# Altium PCB pcb.pcbdoc (part 1 of 6)
Units mm, origin at the board's own origin, x right, y up, seen from the top; angles counter-clockwise.
Board outline 95 x 60 mm, 4 copper layers (Top Layer, TopInt Layer, BotInt Layer, Bottom Layer), stack 1.459 mm thick; 162 components, 164 nets, 673 pads, 269 vias.
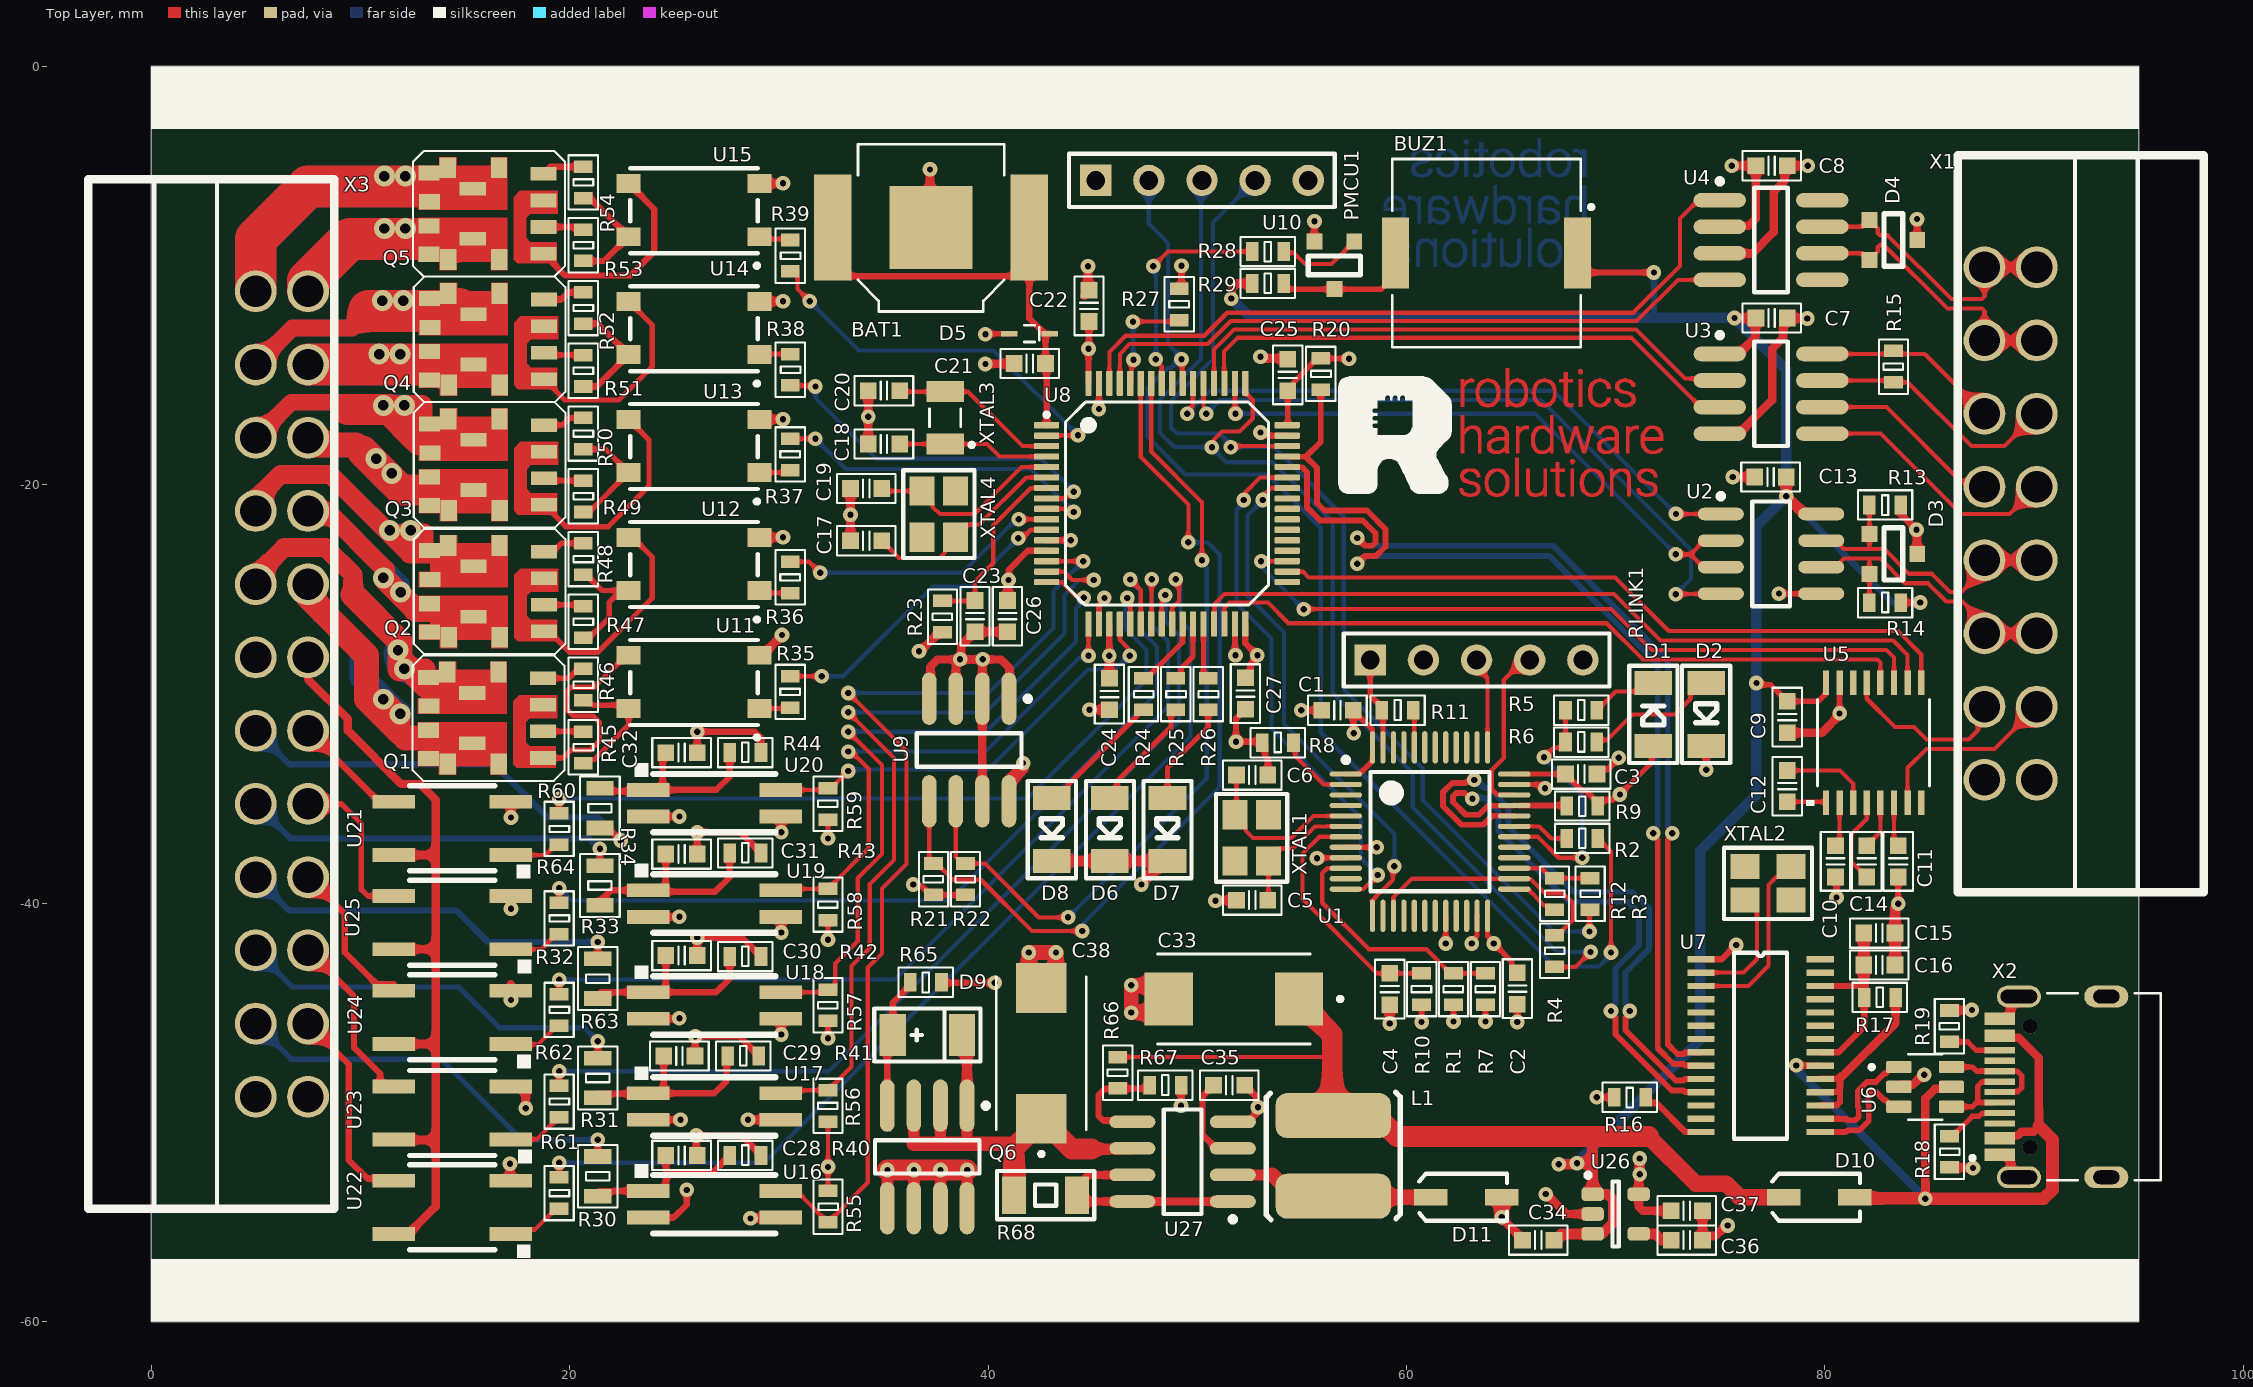
[diagram p0: Top Layer view]
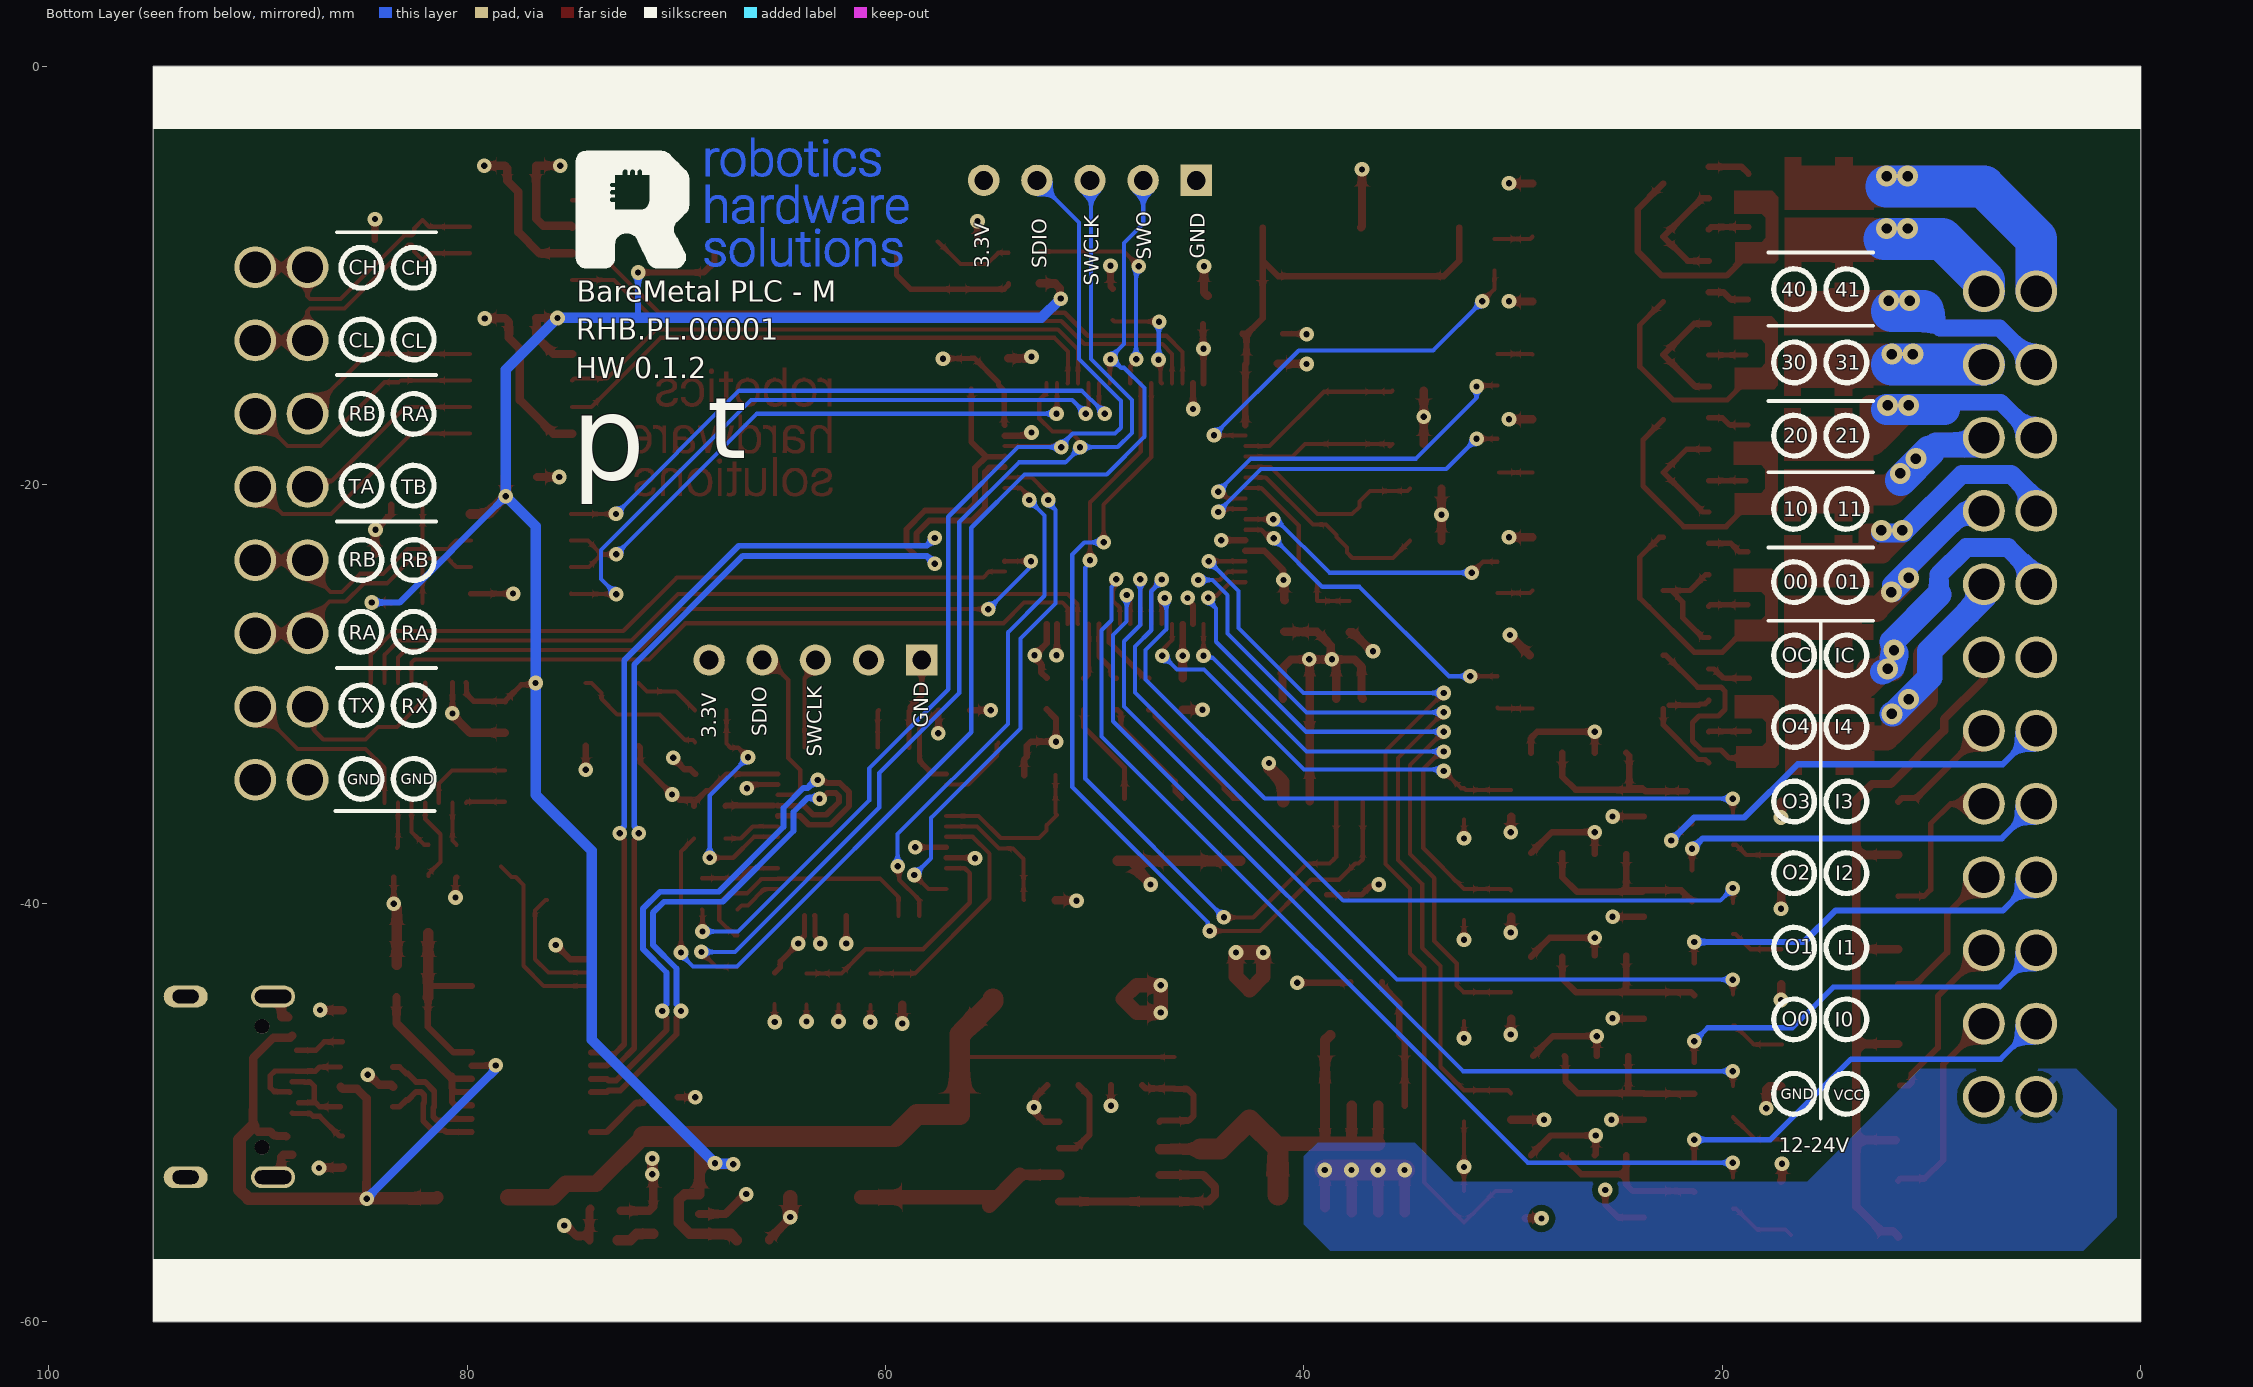
[diagram p1: Bottom Layer view, seen from below]
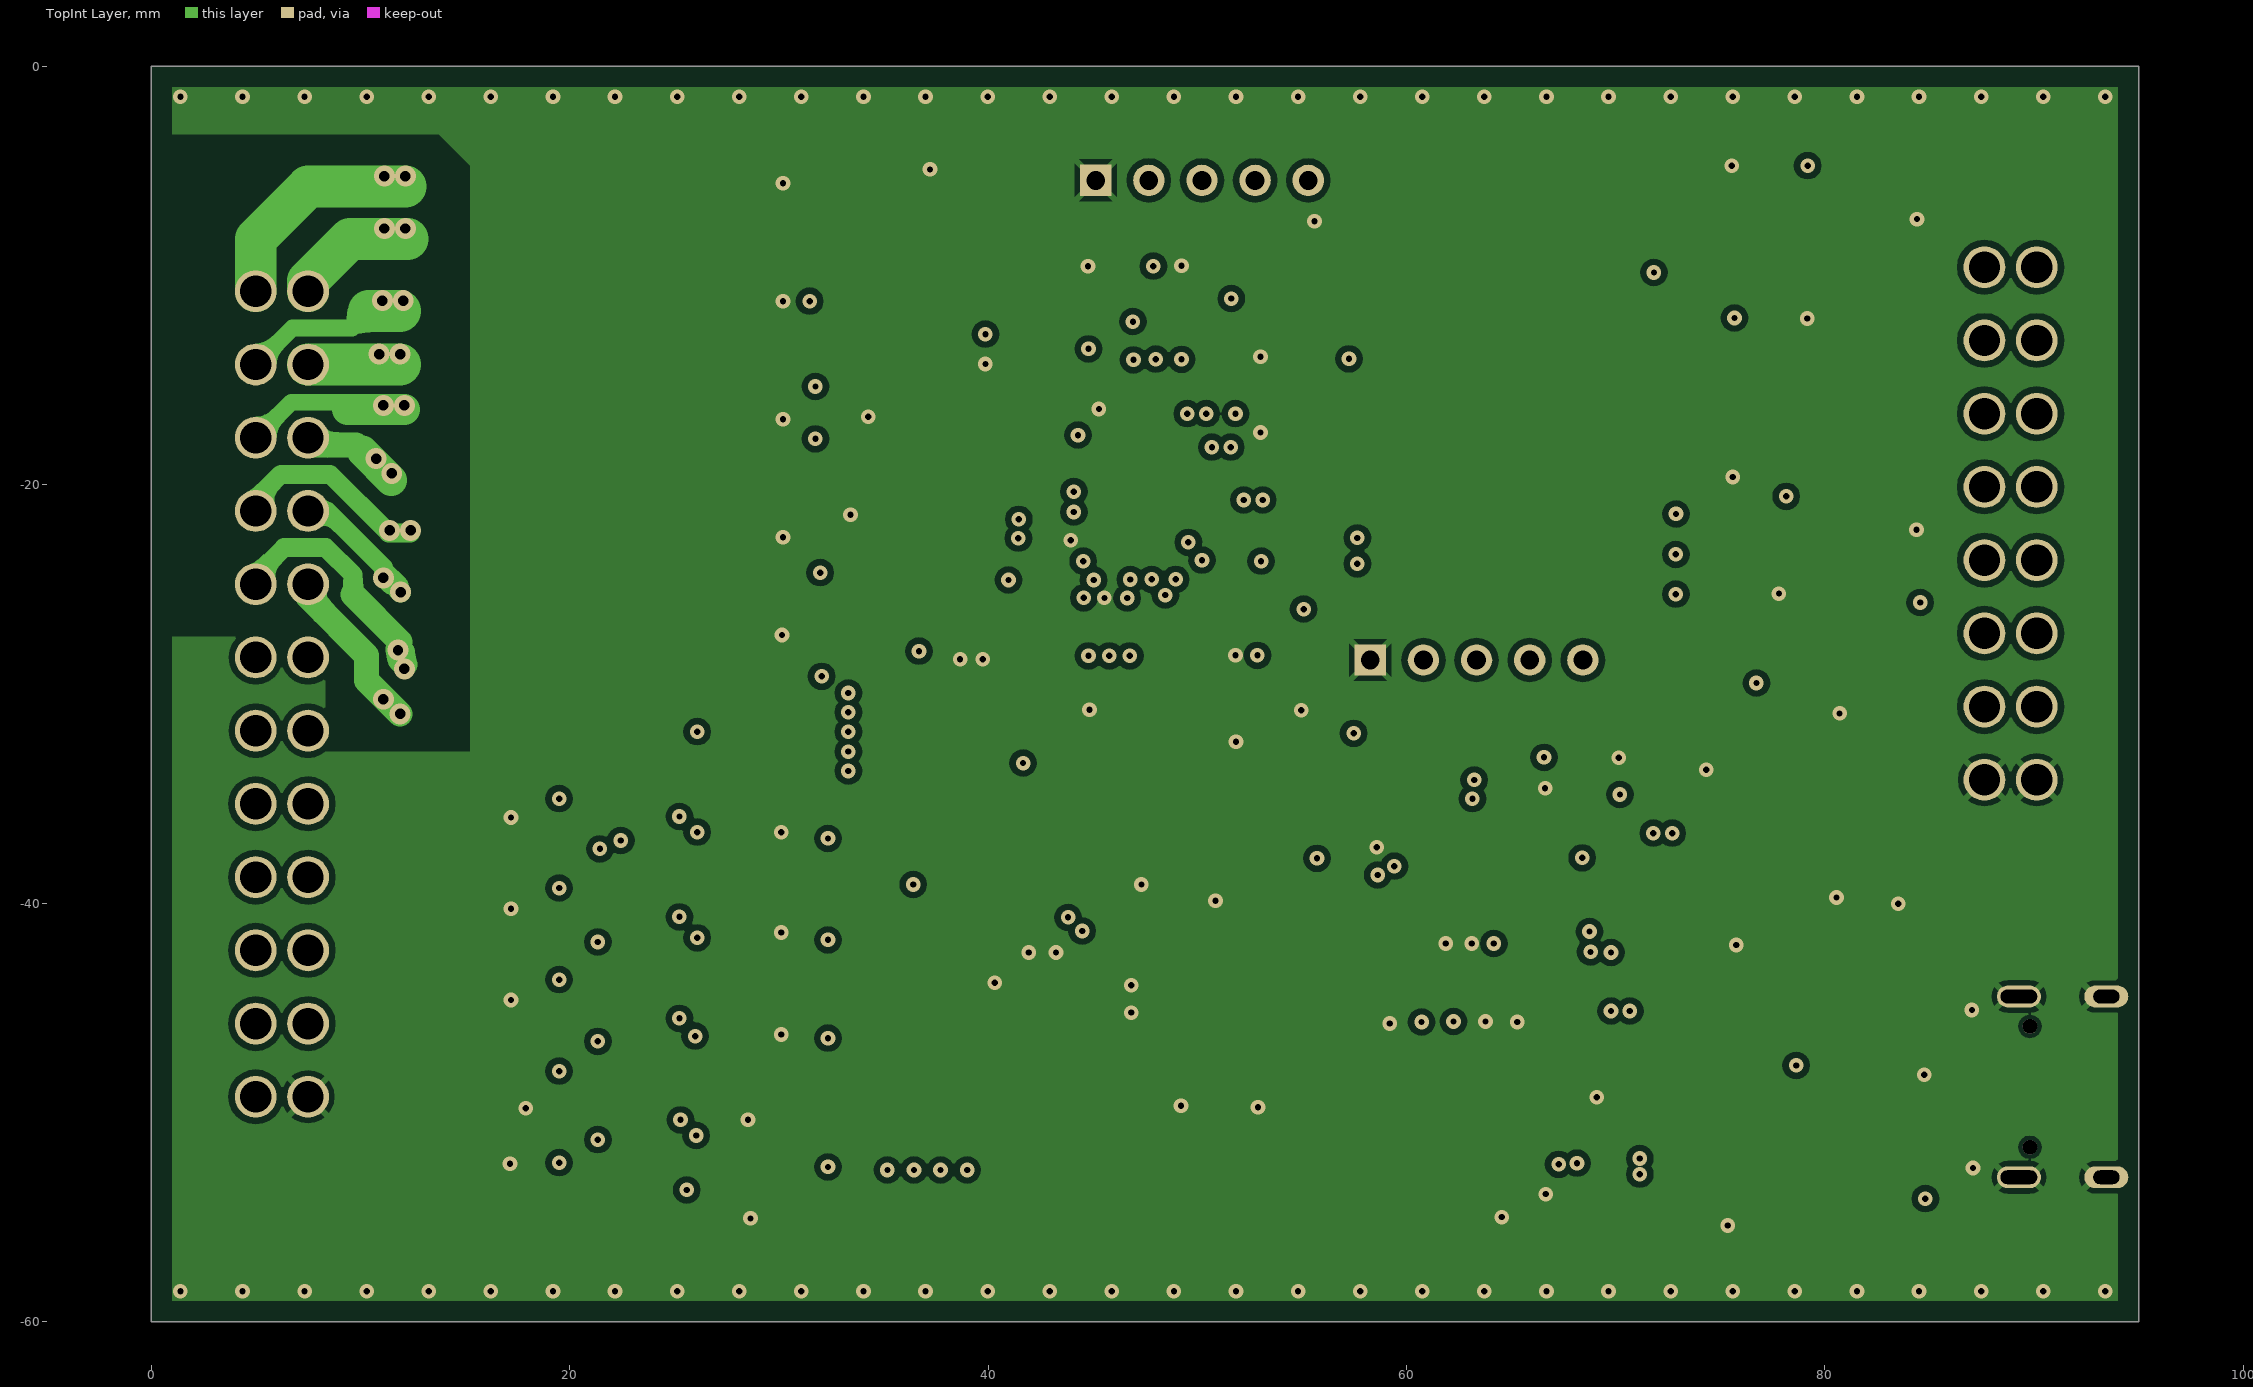
[diagram p2: TopInt Layer]
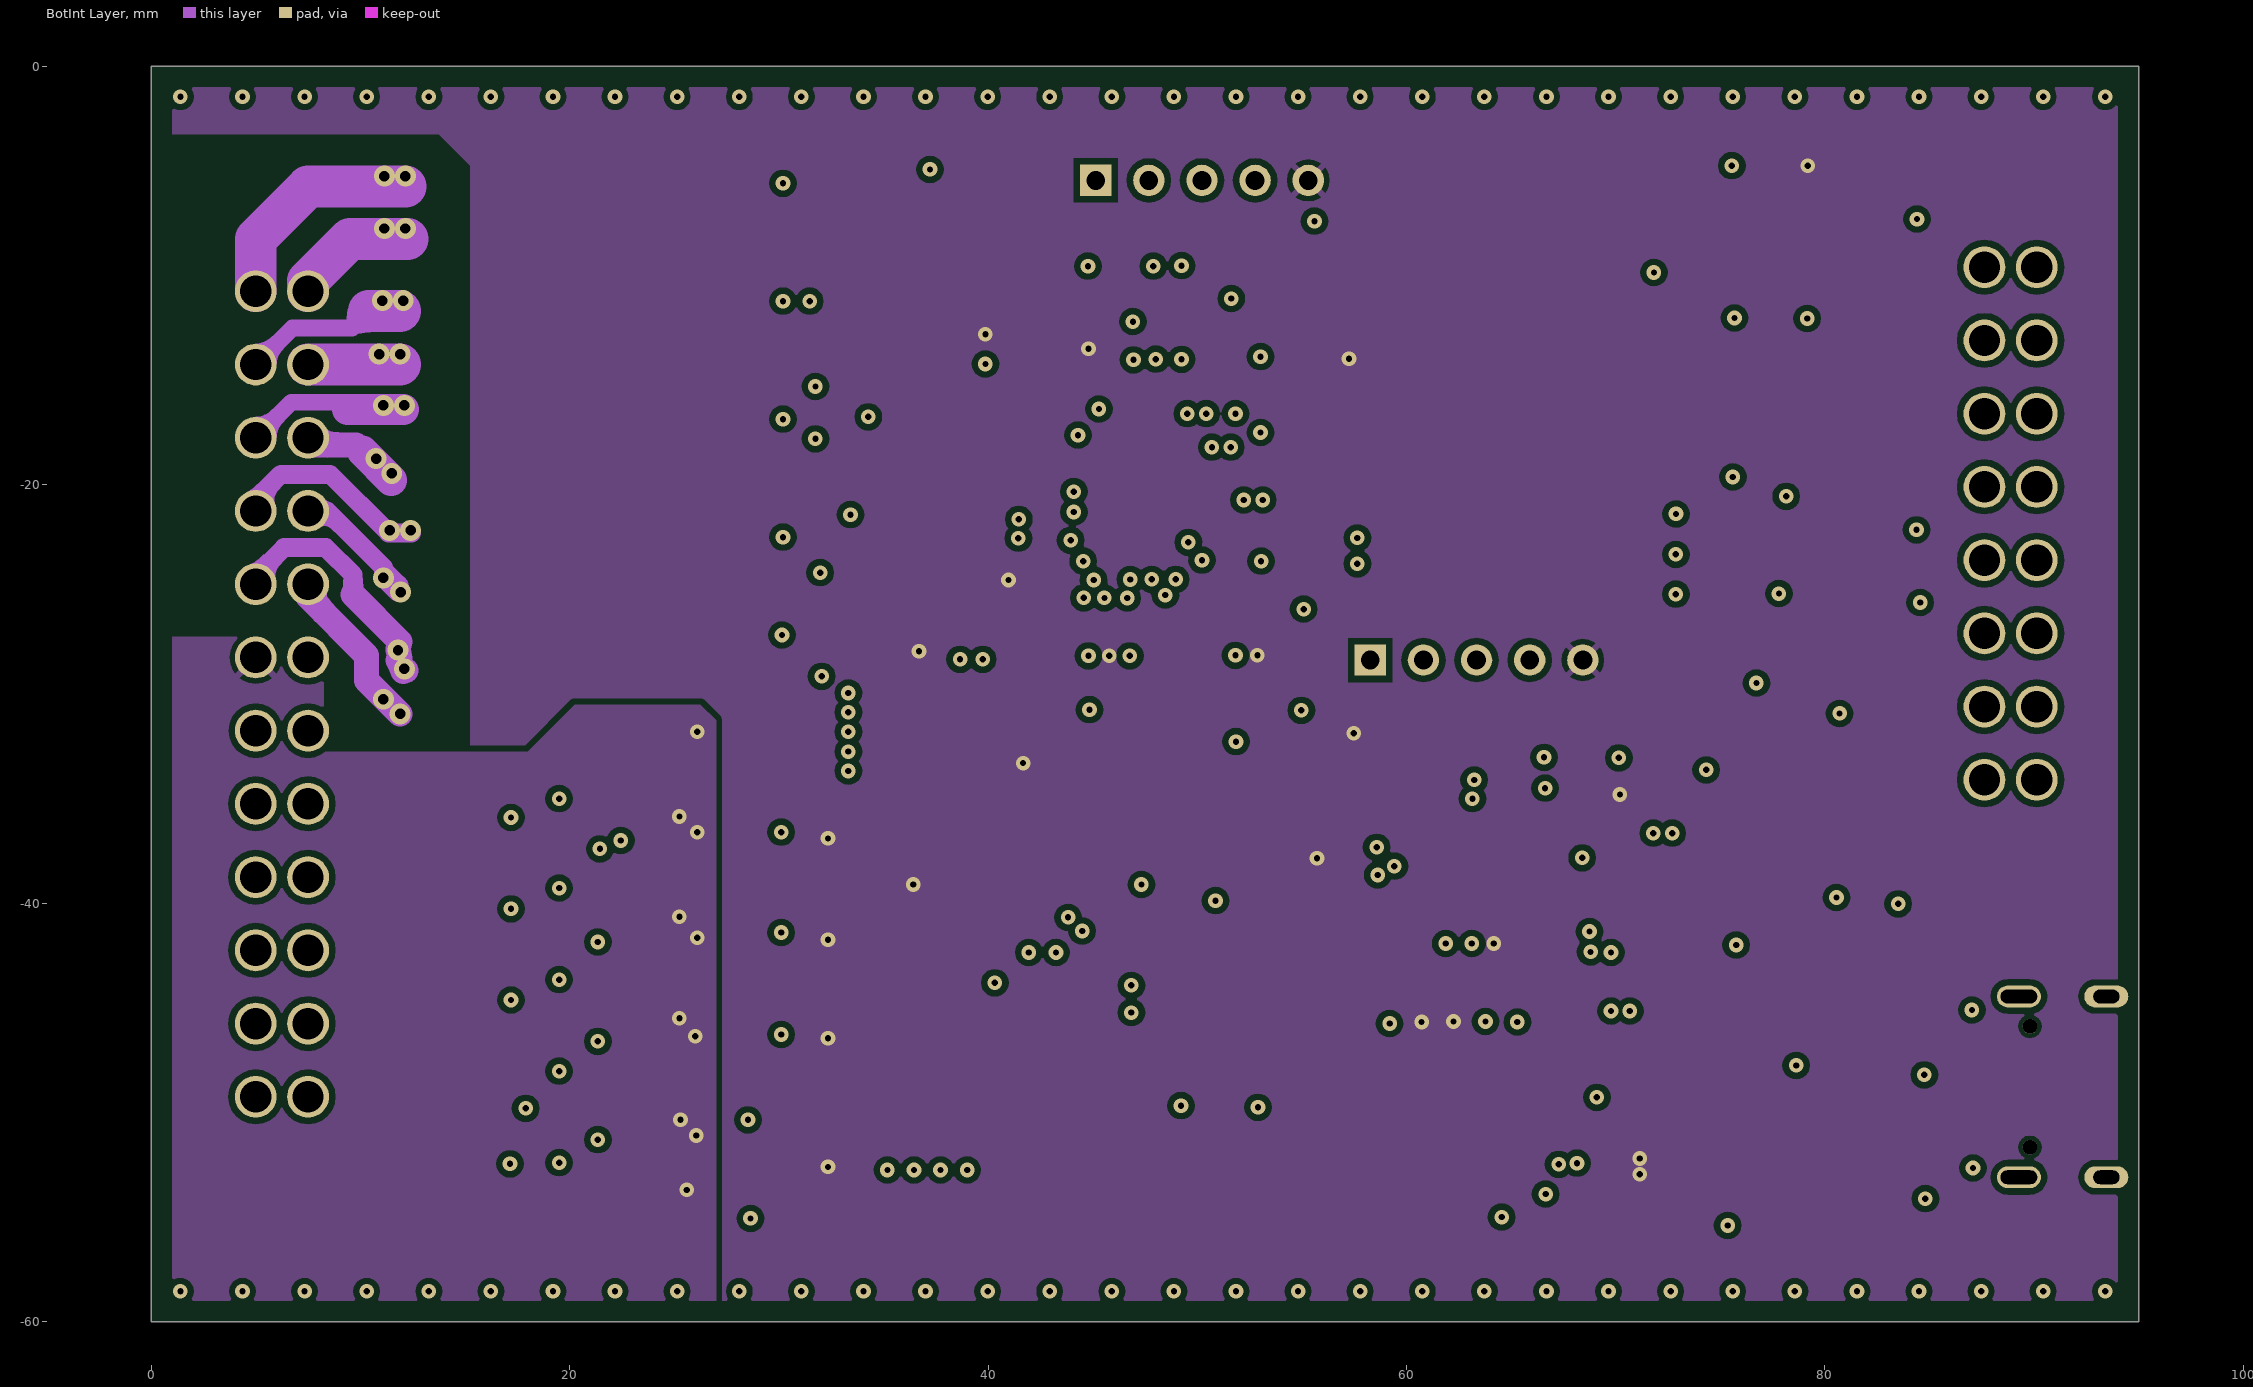
[diagram p3: BotInt Layer]

## Layer stack, top to bottom
Top Solder: solder mask 0.0102, Solder Resist, Dk 3.5
Top Layer: signal copper 0.0356
Dielectric 1: prepreg 0.193, FR-4 (TG-150), Dk 4.6
TopInt Layer: signal copper 0.036
Dielectric 3: core 0.93, FR-4 (TG-150), Dk 4.6
BotInt Layer: signal copper 0.036
Dielectric 2: prepreg 0.193, FR-4 (TG-150), Dk 4.6
Bottom Layer: signal copper 0.0356
Bottom Solder: solder mask 0.0102, Solder Resist, Dk 3.5

## Board outline
0,-60 95,-60 95,0 0,0

## Design rules (kind name [scope] priority, off if disabled: settings)
Clearance [All] p1: gap=0.2 ignorepadtopadclearanceinfootprint=FALSE except(0.3: Arc-Poly Track-Poly SMDPad-Poly THPad-Poly Via-Poly Fill-Poly Poly-Poly)
DiffPairsRouting [InDifferentialPair('USB')] p1: maxlimit=0.2 minlimit=0.127 mostfreqgap=0.2 toplayer_mingap=0.2 toplayer_minwidth=0.279 toplayer_maxwidth=0.279 toplayer_prefwidth=0.279 midlayer1_maxgap=0.127 midlayer1_prefgap=0.127 midlayer1_minwidth=0.096 midlayer1_maxwidth=0.096 midlayer1_prefwidth=0.096 midlayer2_maxgap=0.127 midlayer2_prefgap=0.127 midlayer2_minwidth=0.096 midlayer2_maxwidth=0.096 midlayer2_prefwidth=0.096 bottomlayer_mingap=0.2 bottomlayer_minwidth=0.279 bottomlayer_maxwidth=0.279 bottomlayer_prefwidth=0.279 maxuncoupledlength=12.7
DiffPairsRouting DiffPairsRouting2 [InDifferentialPair('MCU_USB')] p2: maxlimit=0.2 minlimit=0.127 mostfreqgap=0.2 toplayer_mingap=0.2 toplayer_minwidth=0.279 toplayer_maxwidth=0.279 toplayer_prefwidth=0.279 midlayer1_maxgap=0.127 midlayer1_prefgap=0.127 midlayer1_minwidth=0.096 midlayer1_maxwidth=0.096 midlayer1_prefwidth=0.096 midlayer2_maxgap=0.127 midlayer2_prefgap=0.127 midlayer2_minwidth=0.096 midlayer2_maxwidth=0.096 midlayer2_prefwidth=0.096 bottomlayer_mingap=0.2 bottomlayer_minwidth=0.279 bottomlayer_maxwidth=0.279 bottomlayer_prefwidth=0.279 impedanceprofiledriven=TRUE impedanceprofileid={8D9E8F22-5787-4A63-B55F-5B9D1A999BD1} impedanceprofilevalue=90.000000 maxuncoupledlength=12.7
DiffPairsRouting DiffPairsRouting1 [InDifferentialPair('RLINK_USB')] p3: maxlimit=0.2 minlimit=0.127 mostfreqgap=0.2 toplayer_mingap=0.2 toplayer_minwidth=0.279 toplayer_maxwidth=0.279 toplayer_prefwidth=0.279 midlayer1_maxgap=0.127 midlayer1_prefgap=0.127 midlayer1_minwidth=0.096 midlayer1_maxwidth=0.096 midlayer1_prefwidth=0.096 midlayer2_maxgap=0.127 midlayer2_prefgap=0.127 midlayer2_minwidth=0.096 midlayer2_maxwidth=0.096 midlayer2_prefwidth=0.096 bottomlayer_mingap=0.2 bottomlayer_minwidth=0.279 bottomlayer_maxwidth=0.279 bottomlayer_prefwidth=0.279 impedanceprofiledriven=TRUE impedanceprofileid={8D9E8F22-5787-4A63-B55F-5B9D1A999BD1} impedanceprofilevalue=90.000000 maxuncoupledlength=12.7
HoleSize [All] p1: absolutevalues=TRUE maxlimit=4 minlimit=0.2 maxpercent=80.000 minpercent=20.000
MatchedLengths [InNetClass('Undefined')] p1: tolerance=0.5 checknetsindiffpair=FALSE checkdiffpairvsdiffpair=TRUE checkxsignals=TRUE checkothers=TRUE
MinimumSolderMaskSliver [All] p1: minsoldermaskwidth=0.02
PolygonConnect [All] p1: thpad.connectstyle=Relief thpad.reliefconductorwidth=0.3 thpad.reliefentries=4 thpad.polygonreliefangle="45 Angle" thpad.airgapwidth=0.25 smdpad.connectstyle=Relief smdpad.reliefconductorwidth=0.254 smdpad.reliefentries=4 smdpad.polygonreliefangle="90 Angle" smdpad.airgapwidth=0.254 via.connectstyle=Direct via.reliefconductorwidth=0.3 via.reliefentries=4 via.polygonreliefangle="90 Angle" via.airgapwidth=0.25
RoutingVias [All] p1: holewidth=0.3 width=0.7 viastyle="Through Hole" minholewidth=0.3 minwidth=0.7 maxholewidth=0.3 maxwidth=0.7
SilkToSilkClearance [All] p1: silktosilkclearance=0
SilkToSolderMaskClearance [IsPad] p1: minsilkscreentomaskgap=0.01 clearancetoexposedcopper=TRUE
SolderMaskExpansion [All] p1: expansion=0.05 istentingtop=FALSE
Width [All] p1: maxlimit=25 minlimit=0.2 preferedwidth=1 midlayer1_maxwidth=5 midlayer2_maxwidth=5 minimp=50.000000 maximp=50.000000 favimp=50.000000
25 further rules are at their usual default settings.

## Classes and differential pairs
component class usb: C15 C16 R16 R17 R18 R19 U6 U7 X2 XTAL2
component class dcdc: C33 C34 C35 C36 C37 C38 D10 D11 L1 R66 R67 R68 U26 U27
component class MCU: BAT1 BUZ1 C17 C18 C19 C20 C21 C22 C23 C24 C25 C26 C27 D5 D6 D7 D8 R20 R21 R22 R23 R24 R25 R26 R27 R28 R29 U8 U9 U10 XTAL3 XTAL4
component class interfaces: C7 C8 C9 C10 C11 C12 C13 C14 D3 D4 R13 R14 R15 U2 U3 U4 U5 X1
component class connections: C28 C29 C30 C31 C32 D9 Q1 Q2 Q3 Q4 Q5 Q6 R30 R31 R32 R33 R34 R35 R36 R37 R38 R39 R40 R41 R42 R43 R44 R45 R46 R47 R48 R49 R50 R51 R52 R53 R54 R55 R56 R57 R58 R59 R60 R61 R62 R63 R64 R65 U11 U12 U13 U14 U15 U16 U17 U18 U19 U20 U21 U22 U23 U24 U25 X3
component class rlink: C1 C2 C3 C4 C5 C6 D1 D2 PMCU1 R1 R2 R3 R4 R5 R6 R7 R8 R9 R10 R11 R12 RLINK1 U1 XTAL1
differential pair RLINK_USB: +RLINK_USB_P -RLINK_USB_N
differential pair MCU_USB: +MCU_USB_P -MCU_USB_N
differential pair USB: +USB_P -USB_N
differential pair USB_CONN_D: +USB_CONN_D_P -USB_CONN_D_N
differential pair RS485: +RS485_P -RS485_N
differential pair RS422_TX: +RS422_TX_P -RS422_TX_N
differential pair RS422_RX: +RS422_RX_P -RS422_RX_N
differential pair CAN: +CAN_P -CAN_N

## Components (designator, comment, footprint, x,y, rotation, side; value= is the part's Value field where it differs from the comment)
BAT1 "2998TR" BAT_2998TR 37.275,-7.7 r180 top
BUZ1 "L-KLS3-SMT-09X1.8" SPKR_PKMCS0909E4000-R1 63.825,-8.925 r180 top locked
C1 "100nF" C_0603 56.7,-30.775 r0 top
C2 "100nF" C_0603 65.3,-44.075 r90 top
C3 "100nF" C_0603 68.35,-33.825 r180 top
C4 "100nF" C_0603 59.2,-44.1 r90 top
C5 "8pF 50V" C_0603 52.625,-39.85 r0 top
C6 "8pF 50V" C_0603 52.625,-33.875 r180 top
C7 "100nF" C_0603 77.45,-12.025 r180 top
C8 "100nF" C_0603 77.45,-4.75 r0 top
C9 "100nF" C_0603 78.2,-31.1 r90 top
C10 "100nF" C_0603 80.5,-38 r90 top
C11 "100nF" C_0603 83.5,-38 r90 top
C12 "100nF" C_0603 78.2,-34.4 r90 top
C13 "100nF" C_0603 77.4,-19.625 r0 top
C14 "100nF" C_0603 82,-38 r90 top
C15 "100nF" C_0603 82.6,-41.425 r180 top
C16 "1uF 16V" C_0603 82.6,-42.95 r180 top
C17 "8pF 50V" C_0603 34.175,-22.675 r0 top
C18 "8pF 50V" C_0603 35.025,-18.05 r0 top
C19 "8pF 50V" C_0603 34.175,-20.175 r0 top
C20 "8pF 50V" C_0603 35.025,-15.5 r0 top
C21 "100nF" C_0603 42,-14.2 r0 top
C22 "100nF" C_0603 44.825,-11.45 r270 top
C23 "100nF" C_0603 39.375,-26.275 r90 top
C24 "100nF" C_0603 45.8,-30 r90 top
C25 "100nF" C_0603 54.325,-14.75 r270 top
C26 "100nF" C_0603 40.925,-26.275 r90 top
C27 "100nF" C_0603 52.3,-29.975 r90 top
C28 "100nF" C_0603 25.35,-52.05 r180 top
C29 "100nF" C_0603 25.25,-47.3 r180 top
C30 "100nF" C_0603 25.35,-42.5 r180 top
C31 "100nF" C_0603 25.35,-37.65 r180 top
C32 "100nF" C_0603 25.35,-32.8 r180 top
C33 "150uF 16V" TANTAL_TYPE_D 51.75,-44.575 r180 top
C34 "1uF 16V" C_0603 66.3,-56.1 r0 top
C35 "470pF 16V" C_0603 51.525,-48.7 r180 top
C36 "10nF 16V" C_0603 73.4,-56.1 r180 top
C37 "1uF 16V" C_0603 73.4,-54.7 r180 top
C38 "47uF 35V" TANTAL_TYPE_X 42.55,-47.175 r90 top
D1 "Green" LED_1206 71.8,-30.975 r90 top
D2 "Green" LED_1206 74.325,-30.975 r270 top
D3 "SM712-02HTG" SOT23 82.125,-22.353 r0 top
D4 "ESDCAN24-2BLY" SOT23 82.125,-7.35 r0 top
D5 "RB521S30T1G" SOD-523 41.975,-12.775 r180 top
D6 "Yellow" LED_1206 45.825,-36.475 r270 top
D7 "Green" LED_1206 48.575,-36.475 r270 top
D8 "Red" LED_1206 43.05,-36.475 r270 top
D9 "BZV55C10" SOD80C 37.1,-46.3 r0 top
D10 "SM5819PL-TP" SOD-123 79.725,-54.05 r180 top
D11 "SM5819PL-TP" SOD-123 62.85,-54.05 r180 top
L1 "CD54NP-221KC" CD54NP 56.5,-52.075 r180 top
PMCU1 "PLS2-5" PLS-5-3D 45.145,-5.45 r0 top
Q1 "IPG20N06S2L65AATMA1" "POWERFLAT 5X6" 12.75,-31.15 r90 top
Q2 "IPG20N06S2L65AATMA1" "POWERFLAT 5X6" 12.8,-25.1 r90 top
Q3 "IPG20N06S2L65AATMA1" "POWERFLAT 5X6" 12.8,-19.05 r90 top
Q4 "IPG20N06S2L65AATMA1" "POWERFLAT 5X6" 12.8,-13.05 r90 top
Q5 "IPG20N06S2L65AATMA1" "POWERFLAT 5X6" 12.775,-7.045 r90 top
Q6 "IRF7205" SO-8_M 37.09,-52.123 r270 top
R1 "4.7K" R_0603 63.775,-44.1 r270 top value=4.7k
R2 "0" R_0603 68.4,-36.9 r180 top
R3 "0" R_0603 68.775,-39.55 r90 top
R4 "0" R_0603 67.075,-42.275 r90 top
R5 "100" R_0603 68.35,-30.775 r180 top
R6 "100" R_0603 68.35,-32.3 r180 top
R7 "4.7K" R_0603 62.25,-44.1 r270 top value=4.7k
R8 "10K" R_0603 53.85,-32.325 r180 top value=10k
R9 "1.5K" R_0603 68.4,-35.35 r0 top value=1.5k
R10 "100K" R_0603 60.725,-44.1 r270 top value=100k
R11 "100K" R_0603 59.575,-30.775 r180 top value=100k
R12 "100" R_0603 67.075,-39.55 r90 top
R13 "10k" R_0603 82.875,-20.958 r0 top
R14 "10k" R_0603 82.875,-25.633 r180 top
R15 "120" R_0603 83.275,-14.35 r270 top
R16 "2.7k" R_0603 70.675,-49.275 r0 top
R17 "100k" R_0603 82.625,-44.5 r180 top
R18 "5.1k" R_0603 85.95,-51.875 r90 top
R19 "5.1k" R_0603 85.95,-45.875 r270 top
R20 "1.5k" R_0603 55.9,-14.7 r90 top
R21 "4.7k" R_0603 37.4,-38.85 r270 top
R22 "4.7k" R_0603 38.925,-38.85 r270 top
R23 "10K" R_0603 37.825,-26.3 r270 top value=10k
R24 "100" R_0603 47.425,-30 r90 top
R25 "100" R_0603 48.975,-30 r90 top
R26 "100" R_0603 50.525,-30 r90 top
R27 "10K" R_0603 49.142,-11.375 r270 top value=10k
R28 "3.3K" R_0603 53.375,-8.85 r0 top value=3.3k
R29 "1K" R_0603 53.375,-10.375 r180 top value=1k
R30 "3.3K" R_0805 21.35,-53.05 r270 top value=3.3k
R31 "3.3K" R_0805 21.35,-48.35 r270 top value=3.3k
R32 "3.3K" R_0805 21.35,-43.6 r270 top value=3.3k
R33 "3.3K" R_0805 21.45,-39.15 r270 top value=3.3k
R34 "3.3K" R_0805 21.45,-35.45 r90 top value=3.3k
R35 "100" R_0603 30.55,-29.9 r270 top
R36 "100" R_0603 30.55,-24.425 r270 top
R37 "100" R_0603 30.55,-18.55 r270 top
R38 "100" R_0603 30.55,-14.5 r90 top
R39 "100" R_0603 30.55,-9.05 r90 top
R40 "680" R_0603 28.4,-52.05 r180 top
R41 "680" R_0603 28.3,-47.3 r180 top
R42 "680" R_0603 28.4,-42.55 r180 top
R43 "680" R_0603 28.4,-37.6 r180 top
R44 "680" R_0603 28.4,-32.8 r180 top
R45 "100" R_0603 20.65,-32.55 r90 top
R46 "100" R_0603 20.65,-29.55 r90 top
R47 "100" R_0603 20.65,-26.55 r90 top
R48 "100" R_0603 20.65,-23.55 r90 top
R49 "100" R_0603 20.65,-20.55 r90 top
R50 "100" R_0603 20.65,-17.55 r90 top
R51 "100" R_0603 20.65,-14.55 r90 top
R52 "100" R_0603 20.65,-11.55 r90 top
R53 "100" R_0603 20.65,-8.55 r90 top
R54 "100" R_0603 20.65,-5.55 r90 top
R55 "1K" R_0603 32.35,-54.5 r90 top value=1k
R56 "1K" R_0603 32.35,-49.688 r270 top value=1k
R57 "1K" R_0603 32.35,-44.875 r270 top value=1k
R58 "1K" R_0603 32.35,-40.063 r270 top value=1k
R59 "1K" R_0603 32.35,-35.25 r270 top value=1k
R60 "1K" R_0603 19.5,-36.45 r90 top value=1k
R61 "1K" R_0603 19.5,-53.85 r90 top value=1k
R62 "1K" R_0603 19.5,-49.475 r90 top value=1k
R63 "1K" R_0603 19.5,-45.1 r90 top value=1k
R64 "1K" R_0603 19.5,-40.725 r90 top value=1k
R65 "100K" R_0603 37.025,-43.775 r0 top value=100k
R66 "3.6K" R_0603 46.2,-48.1 r270 top value=3.6k
R67 "1.2K" R_0603 48.475,-48.7 r180 top value=1.2k
R68 "0.33" R_1206 42.75,-53.95 r0 top
RLINK1 "PLS2-5" PLS-5-3D 58.27,-28.375 r0 top
U1 "STM32F103CBT6" LQFP48_L 61.125,-36.575 r0 top locked
U2 "SN75176BDR" SO-8 77.425,-23.3 r0 top locked
U3 "MAX488CSA" SO-8_M 77.425,-15.65 r0 top locked
U4 "SN65HVD232D" SO-8_M 77.425,-8.3 r0 top locked
U5 "ST232CTR" TSSOP16_STM 82.325,-32.329 r90 top locked
U6 "USBLC6-2SC6" SOT95P280X145-6N 84.79,-48.775 r0 top
U7 "FE1.1S_BSOP28" BSOP28 74.075,-42.68 r0 top
U8 "STM32F103RET6" LQFP64 48.55,-20.9 r0 top locked
U9 "24c256" SO-8_M 39.095,-32.675 r270 top
U10 "BC847B" SOT23 57.503,-8.364 r270 top
U11 "VOM1271" SOP-4 25.95,-29.45 r180 top
U12 "VOM1271" SOP-4 25.95,-23.812 r180 top
U13 "VOM1271" SOP-4 25.95,-18.175 r180 top
U14 "VOM1271" SOP-4 25.95,-12.538 r180 top
U15 "VOM1271" SOP-4 25.95,-6.9 r180 top
U16 "TLP290" SO4_1.27 23.75,-52.48 r0 top
U17 "TLP290" SO4_1.27 23.75,-47.81 r0 top
U18 "TLP290" SO4_1.27 23.75,-42.98 r0 top
U19 "TLP290" SO4_1.27 23.75,-38.11 r0 top
U20 "TLP290" SO4_1.27 23.75,-33.31 r0 top
U21 "CPC1008N" SO4_2_54 17.188,-37.69 r180 top
U22 "CPC1008N" SO4_2_54 17.188,-55.8 r180 top
U23 "CPC1008N" SO4_2_54 17.188,-51.292 r180 top
U24 "CPC1008N" SO4_2_54 17.188,-46.724 r180 top
U25 "CPC1008N" SO4_2_54 17.188,-42.198 r180 top
U26 "LD3985M33R" SOT23-5 68.899,-53.9 r0 top
U27 "MC33063" SO-8 49.3,-52.35 r180 top
X1 "15EDGRHCM-THR-3.5-16P" "DMC 1,5/ 8-G1F-3,5-LR P20THR / 1787072" 93.5,-20.4 r270 top locked
X2 "TYPE-C-31-M-12" HRO_TYPE-C-31-M-12 93.45,-48.775 r90 top locked
X3 "15EDGRHCM-THR-3.5-24P" "DMC 1,5/12-G1F-3,5-LRP20THRR72" 8.65,-40.5 r90 top locked
XTAL1 "X32258MOB4SI" NX3225GA 51.8,-37.975 r90 top
XTAL2 "X322512MSB4SI" NX3225GA 76.175,-38.25 r0 top
XTAL3 "NX3215SA-32.768K" XTAL_NX3215SA-32.768K-STD-MUA-8 37.95,-16.8 r90 top
XTAL4 "X32258MOB4SI" NX3225GA 36.85,-22.5 r90 top locked

## Footprints (in the part's own frame and the unit in brackets; to place one, negate y for a bottom-side part, rotate by r counter-clockwise, add the part's x,y. Pads: shape width x height; smd on the part's side, far side on the other; paste and mask are expansions set on the pad)
BAT_2998TR [mm]
  rect 3.96x3.96 smd paste-3: N(0,0)
  rect 1.78x5.08 smd: P1(-4.7,0) P1(4.7,0)
  silkscreen extent -3.49,-3.98 3.49,4.02, body extent -5.36,-3.94 5.36,4.06, height 3.05
BSOP28 [mm]
  rect 1.3x0.3 smd: 1(0,0) 2(0,-0.635) 3(0,-1.27) 4(0,-1.905) 5(0,-2.54) 6(0,-3.175) 7(0,-3.81) 8(0,-4.445) 9(0,-5.08) 10(0,-5.715) 11(0,-6.35) 12(0,-6.985) 13(0,-7.62) 14(0,-8.255) 15(5.7,-8.255) 16(5.7,-7.62) 17(5.7,-6.985) 18(5.7,-6.35) 19(5.7,-5.715) 20(5.7,-5.08) 21(5.7,-4.445) 22(5.7,-3.81) 23(5.7,-3.175) 24(5.7,-2.54) 25(5.7,-1.905) 26(5.7,-1.27) 27(5.7,-0.635) 28(5.7,0)
  silkscreen extent 1.58,-8.57 4.12,0.32, body extent -0.26,-9.12 5.92,0.86, height 1.75
C_0603 [mm] "Chip Capacitor; Body 1.6 x 0.8 mm (LxW typ)"
  rect 0.8x0.8 smd: 1(-0.75,0) 2(0.75,0)
  silkscreen extent -1.4,-0.7 1.4,0.7, body extent -0.8,-0.4 0.8,0.4, height 0.3
CD54NP [mm] "inductor"
  rrect50% 5.5x2.15 smd mask+0.102: 1(0,1.925) 2(0,-1.925)
  silkscreen extent -3.2,-3.05 3.2,3.05, body extent -2.6,-2.96 2.6,2.96, height 4.5
"DMC 1,5/12-G1F-3,5-LRP20THRR72" [mm] "Connector LR"
  round 2 hole 1.5: 1(-8.75,3.65) 2(-5.25,3.65) 3(-1.75,3.65) 4(1.75,3.65) 5(5.25,3.65) 6(8.75,3.65) 7(12.25,3.65) 8(15.75,3.65) 9(19.25,3.65) 10(22.75,3.65) 11(26.25,3.65) 12(29.75,3.65) 13(29.75,1.15) 14(26.25,1.15) 15(22.75,1.15) 16(19.25,1.15) 17(15.75,1.15) 18(12.25,1.15) 19(8.75,1.15) 20(5.25,1.15) 21(1.75,1.15) 22(-1.75,1.15) 23(-5.25,1.15) 24(-8.75,1.15)
  silkscreen extent -14.2,-0.1 35.1,11.65, body extent -14,0.05 35,11.65, height 10.9
"DMC 1,5/ 8-G1F-3,5-LR P20THR / 1787072" [mm]
  round 2 hole 1.5 mask+0: 1(-10.8,-3.375) 2(-7.3,-3.375) 3(-3.8,-3.375) 4(-0.3,-3.375) 5(3.2,-3.375) 6(6.7,-3.375) 7(10.2,-3.375) 8(13.7,-3.375) 9(13.7,-5.875) 10(10.2,-5.875) 11(6.7,-5.875) 12(3.2,-5.875) 13(-0.3,-5.875) 14(-3.8,-5.875) 15(-7.3,-5.875) 16(-10.8,-5.875)
  silkscreen extent -16.15,-7.15 19.1,4.6, body extent -16.08,-6.98 18.93,4.62, height 10.8
HRO_TYPE-C-31-M-12 [mm]
  rect 0.6x1.45 smd: A1B12(-3.25,5.095) A4B9(-2.45,5.095) B1A12(3.25,5.095) B4A9(2.45,5.095)
  rect 0.3x1.45 smd: A5(-1.25,5.095) A6(-0.25,5.095) A7(0.25,5.095) A8(1.25,5.095) B5(1.75,5.095) B6(0.75,5.095) B7(-0.75,5.095) B8(-1.75,5.095)
  oval 1.05x2.1 hole 0.65 slot 1.75 at 90 deg: S1(-4.32,4.18) S2(4.32,4.18)
  oval 1.05x2.1 hole 0.65 slot 1.25 at 90 deg: S3(-4.32,0) S4(4.32,0)
  round 0.7 hole 0.7 unplated: ""(-2.89,3.65) ""(2.89,3.65)
  silkscreen extent -4.47,-2.6 4.47,6.5, body extent -4.47,-2.6 4.47,5.31, height 3.31
LED_1206 [mm]
  rect 1.15x1.8 smd: 1(-1.5,0) 2(1.5,0)
  silkscreen extent -2.32,-1.15 2.33,1.15, body extent -1.6,-0.8 1.6,0.8, height 1.1
LQFP48_L [mm] "Thin QFP, 48-Leads, Body 7x7mm, Pitch 0.5mm, IPC High Density"
  oval 1.55x0.25 smd: 1(-4.025,2.75) 2(-4.025,2.25) 3(-4.025,1.75) 4(-4.025,1.25) 5(-4.025,0.75) 6(-4.025,0.25) 7(-4.025,-0.25) 8(-4.025,-0.75) 9(-4.025,-1.25) 10(-4.025,-1.75) 11(-4.025,-2.25) 12(-4.025,-2.75) 25(4.025,-2.75) 26(4.025,-2.25) 27(4.025,-1.75) 28(4.025,-1.25) 29(4.025,-0.75) 30(4.025,-0.25) 31(4.025,0.25) 32(4.025,0.75) 33(4.025,1.25) 34(4.025,1.75) 35(4.025,2.25) 36(4.025,2.75)
  oval 0.25x1.55 smd: 13(-2.75,-4.025) 14(-2.25,-4.025) 15(-1.75,-4.025) 16(-1.25,-4.025) 17(-0.75,-4.025) 18(-0.25,-4.025) 19(0.25,-4.025) 20(0.75,-4.025) 21(1.25,-4.025) 22(1.75,-4.025) 23(2.25,-4.025) 24(2.75,-4.025) 37(2.75,4.025) 38(2.25,4.025) 39(1.75,4.025) 40(1.25,4.025) 41(0.75,4.025) 42(0.25,4.025) 43(-0.25,4.025) 44(-0.75,4.025) 45(-1.25,4.025) 46(-1.75,4.025) 47(-2.25,4.025) 48(-2.75,4.025)
  silkscreen extent -4.15,-2.85 2.85,3.55, body extent -4.5,-4.5 4.5,4.5, height 1.5
LQFP64 [mm]
  rrect30% 1.2x0.3 smd mask+0.08: 1(-5.75,3.75) 2(-5.75,3.25) 3(-5.75,2.75) 4(-5.75,2.25) 5(-5.75,1.75) 6(-5.75,1.25) 7(-5.75,0.75) 8(-5.75,0.25) 9(-5.75,-0.25) 10(-5.75,-0.75) 11(-5.75,-1.25) 12(-5.75,-1.75) 13(-5.75,-2.25) 14(-5.75,-2.75) 15(-5.75,-3.25) 16(-5.75,-3.75) 33(5.75,-3.75) 34(5.75,-3.25) 35(5.75,-2.75) 36(5.75,-2.25) 37(5.75,-1.75) 38(5.75,-1.25) 39(5.75,-0.75) 40(5.75,-0.25) 41(5.75,0.25) 42(5.75,0.75) 43(5.75,1.25) 44(5.75,1.75) 45(5.75,2.25) 46(5.75,2.75) 47(5.75,3.25) 48(5.75,3.75)
  rrect30% 0.3x1.2 smd mask+0.08: 17(-3.75,-5.75) 18(-3.25,-5.75) 19(-2.75,-5.75) 20(-2.25,-5.75) 21(-1.75,-5.75) 22(-1.25,-5.75) 23(-0.75,-5.75) 24(-0.25,-5.75) 25(0.25,-5.75) 26(0.75,-5.75) 27(1.25,-5.75) 28(1.75,-5.75) 29(2.25,-5.75) 30(2.75,-5.75) 31(3.25,-5.75) 32(3.75,-5.75) 49(3.75,5.75) 50(3.25,5.75) 51(2.75,5.75) 52(2.25,5.75) 53(1.75,5.75) 54(1.25,5.75) 55(0.75,5.75) 56(0.25,5.75) 57(-0.25,5.75) 58(-0.75,5.75) 59(-1.25,5.75) 60(-1.75,5.75) 61(-2.25,5.75) 62(-2.75,5.75) 63(-3.25,5.75) 64(-3.75,5.75)
  silkscreen extent -5.85,-4.85 4.85,4.85, body extent -6,-6 6,6, height 1.5
NX3225GA [mm]
  rect 1.4x1.2 smd: 1(0,-1.6) 2(2.2,-1.6) 3(2.2,0) 4(0,0)
  silkscreen extent -1,-2.5 3.2,0.9, body extent -0.49,-2.05 2.69,0.45, height 0.69
PLS-5-3D [mm] "Connector; Header; 5 Position"
  rect 1.5x1.5 hole 0.9: 1(0,0)
  round 1.5 hole 0.9: 2(2.54,0) 3(5.08,0) 4(7.62,0) 5(10.16,0)
  silkscreen extent -1.27,-1.27 11.43,1.27, body extent -1.27,-1.27 11.43,1.27, height 8.44
"POWERFLAT 5X6" [mm]
  rect 0.65x1.25 smd: 1(-0.635,-5.975) 2(-1.905,-5.975) 4(1.905,-5.975) 5(0.635,-5.975)
  rect 1x0.8 smd mask+0.05: 3(-2.184,-1.422) 6(2.2,-1.4)
  rect 1x0.78 smd mask+0.05: 3(-2.184,-3.861) 6(2.2,-3.85)
  rect 0.725x1 smd mask+0.05: 3(-1.938,-0.5) 3(-0.584,-0.508)
  rect 0.65x1.25 smd mask+0: 3(-1.2,-2.6) 6(1.2,-2.6)
  rect 0.725x1.01 smd mask+0.05: 6(0.575,-0.525)
  rect 0.715x1 smd mask+0.05: 6(1.95,-0.5)
  Top Layer region: -0.2,-4.25 -2.3,-4.25 -2.7,-4.25 -2.7,-3.45 -2.3,-3.45 -2.3,-1.825 -2.7,-1.825 -2.7,-1 -2.3,-1 -2.3,0 -1.575,0 -1.575,-0.55 -0.95,-0.55 -0.95,0 -0.2,0
  Top Layer region: 0.2,-4.25 2.3,-4.25 2.7,-4.25 2.7,-3.45 2.3,-3.45 2.3,-1.825 2.7,-1.825 2.7,-1 2.3,-1 2.3,0 1.575,0 1.575,-0.55 0.95,-0.55 0.95,0 0.2,0
  silkscreen extent -3,-7 3,0.25, body extent -2.6,-6.37 2.6,-0.22, height 0.95
R_0603 [mm]
  rect 0.6x0.9 smd: 1(-0.75,0) 2(0.75,0)
  silkscreen extent -1.3,-0.7 1.3,0.7, body extent -0.8,-0.41 0.8,0.41, height 0.45
R_0805 [mm] "Resistor Pattern"
  rect 0.7x1.3 smd: 1(-0.95,0) 2(0.95,0)
  silkscreen extent -1.5,-0.95 1.5,0.95, body extent -1,-0.6 1,0.6, height 0.5
R_1206 [mm]
  rect 1.15x1.8 smd: 1(-1.5,0) 2(1.5,0)
  silkscreen extent -2.32,-1.15 2.33,1.15, body extent -1.6,-0.8 1.6,0.8, height 1
SO4_1.27 [mil] "S0-4"
  rect 80x26 smd: 1(0,-50) 2(0,-100) 3(250,-100) 4(250,-50)
  silkscreen extent -25,-130 240,0, body extent -13,-126 263,-24, height 83
SO4_2_54 [mil] "S0-4"
  rect 80x26 smd: 1(0,0) 2(0,-100) 3(220,-100) 4(220,0)
  silkscreen extent -37,-130 190,44, body extent -28,-121 248,21, height 79
SO-8 [mm] "SOIC, 8-Leads, Body 4.9x3.9mm, Pitch 1.27mm, IPC Medium Density"
  oval 2.2x0.6 smd: 1(-2.4,1.905) 2(-2.4,0.635) 3(-2.4,-0.635) 4(-2.4,-1.905) 5(2.4,-1.905) 6(2.4,-0.635) 7(2.4,0.635) 8(2.4,1.905)
  silkscreen extent -2.52,-2.5 0.9,2.88, body extent -3.17,-2.51 3.17,2.49, height 1.88
SO-8_M [mm] "SOIC, 8-Leads, Body 4.9x3.9mm, Pitch 1.27mm, IPC Low Density"
  oval 2.5x0.7 smd: 1(-2.45,1.905) 2(-2.45,0.635) 3(-2.45,-0.635) 4(-2.45,-1.905) 5(2.45,-1.905) 6(2.45,-0.635) 7(2.45,0.635) 8(2.45,1.905)
  silkscreen extent -2.57,-2.5 0.8,2.93, body extent -3.17,-2.51 3.17,2.49, height 1.88
SOD80C [mm]
  rect 1.25x2 smd: 1(-1.651,0) 2(1.651,0)
  silkscreen extent -2.54,-1.27 2.54,1.27, body extent -1.85,-0.8 1.85,0.8, height 1.6
SOD-123 [mm] "SOD-123; 2 Leads; Body 2.7 x 1.6 mm, (LxW)"
  rect 1.6x0.8 smd: 1(-1.7,0) 2(1.7,0)
  silkscreen extent -1.95,-1.12 2.24,1.12, body extent -1.87,-0.86 1.98,0.84, height 1.43
SOD-523 [mm]
  rect 0.79x0.27 smd: 1(-0.965,0) 2(0.965,0)
  silkscreen extent -0.48,-0.4 0.25,0.4, body extent -0.8,-0.4 0.8,0.4, height 0.7
SOP-4 [mm] "Vishay photovoltaic"
  rect 1.15x0.9 smd: 1(-3.125,1.24) 2(-3.125,-1.3) 3(3.125,-1.3) 4(3.125,1.24)
  silkscreen extent -3.07,-2.03 3.05,2.7, body extent -3.5,-1.92 3.5,1.93, height 2.1
SOT23 [mil]
  rect 30x30 smd: 1(0,0) 2(0,-75) 3(90,-37.5)
  silkscreen extent 28,-87 63,12, body extent -4,-97 94,21, height 41
SOT23-5 [mm]
  rrect50% 1.06x0.65 smd: 1(0,0) 2(0,-0.95) 3(0,-1.9) 4(2.2,-1.9) 5(2.2,0)
  silkscreen extent -0.32,-2.5 1.25,1, body extent -0.07,-2.41 2.27,0.51, height 1
SOT95P280X145-6N [mm]
  rrect25% 1.21x0.59 smd: 1(-1.255,0.95) 2(-1.255,0) 3(-1.255,-0.95) 4(1.255,-0.95) 5(1.255,0) 6(1.255,0.95)
  silkscreen extent -2.65,-1.57 0.81,1.57, body extent -1.4,-1.46 1.4,1.46, height 1.42
SPKR_PKMCS0909E4000-R1 [mm]
  rect 1.3x3.4 smd: 1(-4.35,0) 2(4.35,0)
  silkscreen extent -5.1,-4.5 4.5,4.5, body extent -4.5,-4.5 4.5,4.5, height 1.9
TANTAL_TYPE_D [mm]
  rect 2.3x2.52 smd: 1(-3.11,0) 2(3.11,0)
  silkscreen extent -5.18,-2.15 3.65,2.15, body extent -3.65,-2.15 3.65,2.15, height 3.1
TANTAL_TYPE_X [mm]
  rect 2.37x2.41 smd: 1(-3.125,0) 2(3.125,0)
  silkscreen extent -4.91,-2.15 3.65,2.15, body extent -3.65,-2.15 3.65,2.15, height 4.3
TSSOP16_STM [mm]
  rect 1.162x0.305 smd paste+0 mask+0: 1(-2.871,2.275) 2(-2.871,1.625) 3(-2.871,0.975) 4(-2.871,0.325) 5(-2.871,-0.325) 6(-2.871,-0.975) 7(-2.871,-1.625) 8(-2.871,-2.275) 9(2.871,-2.275) 10(2.871,-1.625) 11(2.871,-0.975) 12(2.871,-0.325) 13(2.871,0.325) 14(2.871,0.975) 15(2.871,1.625) 16(2.871,2.275)
  silkscreen extent -3,-2.68 2.07,3.22, body extent -3.3,-2.55 3.3,2.55, height 1.2
XTAL_NX3215SA-32.768K-STD-MUA-8 [mm]
  rect 1x1.8 smd: 1(-1.25,0) 2(1.25,0)
  silkscreen extent -1.39,-1.37 0.43,0.75, body extent -1.6,-0.75 1.6,0.75, height 0.9

## Part data
BAT1: "Battery", Part Number=2998TR
BUZ1: library part BUZZER, "Piezoelectric Sounders", Alternative Part=PKMCS0909E4000-R1, Part Number=L-KLS3-SMT-09X1.8
C1 C2 C3 C4 C7 C8 C9 C10 C11 C12 C13 C14 C15 C21 C22 C23 C24 C25 C26 C27 C28 C29 C30 C31 C32: library part C0603, "Capacitor", Part Number=CC0603JPX7R9BB104
C5 C6 C17 C18 C19 C20: library part C0603, "Capacitor", Part Number=CC0603DRNPO9BN8R0
C16 C34 C37: library part C0603, "Capacitor", Part Number=CC0603KRX7R7BB105
C33: library part TANTAL_CAP, "Tantal Capacitor", Part Number=T491D157K016AT, Alternative Part=TAJD157K016RNJ
C35: library part C0603, "Capacitor", Part Number=CC0603KRX7R9BB471
C36: library part C0603, "Capacitor", Part Number=CC0603JRX7R7BB103
C38: library part TANTAL_CAP, "Tantal Capacitor", Part Number=T491X476K035AT
D1 D2 D7: library part LED_SMT_1206, "Typical INFRARED GaAs LED", Part Number=KP-3216SGD, Color=Green
D3: library part ESD, "ESD", Part Number=SM712-02HTG
D4: library part ESD_CAN, "ESD", Part Number=ESDCAN24-2BLY
D5: library part D_SOD523, "Diode", Part Number=RB521S30T1G
D6: library part LED_SMT_1206, "Typical INFRARED GaAs LED", Part Number=KPT-3216SYC, Color=Yellow
D8: library part LED_SMT_1206, "Typical INFRARED GaAs LED", Part Number=KP-3216SRD, Color=Red
D9: library part DZ_SOD80, "Diode", Part Number=BZV55C10
D10 D11: library part D_SOD123, "Diode", Part Number=SM5819PL-TP
L1: library part L_CD54NP, "Inductor", Alternative Part=SM5845-221MT, Part Number=CD54NP-221KC
PMCU1 RLINK1: "Header, 5-Pin", Part Number=PLS-5, LatestRevisionDate=17-Jul-2002, LatestRevisionNote="Re-released for DXP Platform.", Publisher="Altium Limited"
Q1 Q2 Q3 Q4 Q5: library part "N-ch Dual PowerFLAT 5x6_1", "Dual N-ch Mosfet", Part Number=IPG20N06S2L65AATMA1
Q6: library part P-ch_SO8, "30V P-Channel  MOSFET", Part Number=IRF7205TRPBF
R1 R7 R21 R22: library part RES_SMD, "Resistor", Part Number=RC0603FR-074K7L
R2 R3 R4: library part RES_SMD, "Resistor", Part Number=RC0603FR-070RL
R5 R6 R12 R24 R25 R26 R35 R36 R37 R38 R39 R45 R46 R47 R48 R49 R50 R51 R52 R53 R54: library part RES_SMD, "Resistor", Part Number=RC0603FR-07100RL
R8 R13 R14 R23 R27: library part RES_SMD, "Resistor", Part Number=RC0603FR-0710KL
R9 R20: library part RES_SMD, "Resistor", Part Number=RC0603FR-071K5L
R10 R11 R17 R65: library part RES_SMD, "Resistor", Part Number=RC0603FR-07100KL
R15: library part RES_SMD, "Resistor", Part Number=RC0603FR-07120RL
R16: library part RES_SMD, "Resistor", Part Number=RC0603FR-072K7L
R18 R19: library part RES_SMD, "Resistor", Part Number=RC0603JR-075K1L
R28: library part RES_SMD, "Resistor", Part Number=RC0603FR-073K3L
R29 R55 R56 R57 R58 R59 R60 R61 R62 R63 R64: library part RES_SMD, "Resistor", Part Number=RC0603FR-071KL
R30 R31 R32 R33 R34: library part RES_SMD, "Resistor", Part Number=RC0805FR-073K3L
R40 R41 R42 R43 R44: library part RES_SMD, "Resistor", Part Number=RC0603FR-07680RL
R66: library part RES_SMD, "Resistor", Part Number=RC0603FR-073K6L
R67: library part RES_SMD, "Resistor", Part Number=RC0603FR-071K2L
R68: library part RES_SMD, "Resistor", Part Number=RL1206FR-070R33L
U1: "STM32 ARM-based 32-bit MCU Performance Line with 128 kB Flash, 20 kB Internal RAM, -40 to +85°C Temperature, 48-Pin LQFP, Tray", ComponentLink1Description="Manufacturer URL", ComponentLink1URL=http://www.st.com/, ComponentLink2Description="STM32F103 Datasheet", ComponentLink2URL=http://www.st.com/internet/com/TECHNICAL_RESOURCES/TECHNICAL_LITERATURE/DATASHEET/CD00161566.pdf, ComponentLink3Description="STM32 Family Web Page", ComponentLink3URL=www.st.com/stm32, DatasheetVersion="rev13.0, Apr-2011", PackageDescription="48-Pin Low-Profile Quad Flat Pack, 7 x 7 mm Body, 0.5 mm Pitch (LQFP48)", PackageReference=LQFP48, PackageVersion="rev13, Apr-2011", Part=STM32F103CBT6, Part Number=STM32F103CBT6
U2: "RS485 Half Duplex Convertor", Part Number=SN75176BDR
U3: library part ADM4855ARZ, "RS485 Full Duplex Convertor", Part Number=MAX488CSA
U4: "CAN_transiever", Part Number=SN65HVD232DR, Alternative Part=XL1050
U5: "No Description Available", Mfr_Name=STMicroelectronics, Alternative Part=SP3232EEY-L/TR, Copyright="Copyright (C) 2022 Ultra Librarian. All rights reserved.", Part Number=ST232CTR, RefDes=RefDes, Type=DEV
U6: "17V Clamp 5A (8/20Âµs) Ipp Tvs Diode Surface Mount SOT-23-6", Package="SOT-23-6 STMicroelectronics", Availability="In Stock", Check_prices=https://www.snapeda.com/parts/USBLC6-2SC6/STMicroelectronics/view-part/?ref=eda, MF=STMicroelectronics, MP=USBLC6-2SC6, Part Number=USBLC6-2SC6, Price=None, Purchase-URL=https://pricing.snapeda.com/search/part/USBLC6-2SC6/?ref=eda, SnapEDA_Link=https://www.snapeda.com/parts/USBLC6-2SC6/STMicroelectronics/view-part/?ref=snap
U7: "USB HUB 2.0", Part Number=FE1.1S-BSOP28BCN
U8: library part STM32F103Rxx, "High-density performance line Arm®-based 32-bit MCU with 256 to 512KB / Flash, USB, CAN, 11 timers, 3 ADCs, 13 communication interfaces", Part Number=STM32F103RET6
U9: "256-Kbit I2C-compatible Serial EEPROM", Part Number=AT24C256C
U10: "45V 200mW 200@2mA,5V 100mA NPN SOT-23-3 Bipolar (BJT)", Part Number=BC847B
U11 U12 U13 U14 U15: "Photovoltaic MOSFET Driver", Part Number=VOM1271T
U16 U17 U18 U19 U20: "4-Pin Phototransistor Optocoupler", Part Number=TLP290[GB.SE, DatasheetVersion=Nov-2003, LatestRevisionDate=04-Mar-2005, LatestRevisionNote="Sch pins 3 & 4 Swapped.", PackageReference=SO-4, Published=24-Mar-1999, Publisher="Altium Limited"
U21 U22 U23 U24 U25: library part OptoMOS_SO4, "4-Pin Phototransistor Optocoupler", Part Number=CPC1008NTR, DatasheetVersion=Nov-2003, LatestRevisionDate=04-Mar-2005, LatestRevisionNote="Sch pins 3 & 4 Swapped.", PackageReference=SO-4, Published=24-Mar-1999, Publisher="Altium Limited"
U26: "Ultra low drop and low noise BiCMOS voltage regulators", Part Number=LD3985M33R
U27: "Step-up/down IC", Part Number=MC33063AP
X1: library part "DMC 1,5/ 8-G1F-3,5-LR P20THR / 1787072", Part Number=15EDGRHCM-THR-3.5-16P
X2: "USB Connectors 24 Receptacle 1 8.94*7.3mm RoHS", Package=None, Availability=Unavailable, MP=TYPE-C-31-M-12, Part Number=TYPE-C-31-M-12, Price=None
X3: library part "DMC 1,5/12-G1F-3,5-LRP20THRR72 / 1706067", Part Number=15EDGRHCM-THR-3.5-24P
XTAL1 XTAL2 XTAL4: library part NX3225GA, "Crystal Oscillator"
  XTAL1 XTAL4: Part Number=X32258MOB4SI
  XTAL2: Part Number=X322512MSB4SI
XTAL3: "Crystal Oscillator", Part Number=NX3215SA-32.768K-10PPM-45KOHM-6PF

## Via types
v1: diameter 0.7, hole 0.3, Top Layer to Bottom Layer, tented both sides, 249 vias
v2: diameter 1, hole 0.5, Top Layer to Bottom Layer, tented both sides, 20 vias

## Nets (pads, with @x,y where several pads share a name; then routed paths per layer and width w, separated by ;. In a path a pad name is that pad's centre, name@x,y a point inside that pad or via, vN(x,y) a via of type N, cw(c..) or ccw(c..) an arc to the next point about the centre after c; other vN are vias at no path point)
BOOT0: R27.2 U8.60 | length 5.3
  Top Layer w0.2: U8.60@46.8,-15.15 46.85,-15.1 46.85,-14.26 46.95,-14.16 v1(46.95,-14.025) ; v1(46.925,-12.2) 49.067,-12.2 R27.2@49.142,-12.125
  Bottom Layer w0.2: v1(46.925,-12.2) 46.938,-12.213 46.938,-14.013 v1(46.95,-14.025)
BUZZER: R28.1 U8.57 | length 10.8
  Top Layer w0.2: v1(47.9,-9.55) 48.6,-8.85 R28.1@52.625,-8.85 ; v1(48.022,-13.997) 48.022,-14.067 48.3,-14.345 U8.57@48.3,-15.15
  Bottom Layer w0.2: v1(47.9,-9.55) 47.9,-9.685 48.022,-9.807 v1(48.022,-13.997)
CAN_N: D4.2 U4.6 X1.2 X1.15 | length 13.6
  Top Layer w0.2: U4.6@79.875,-8.935 81.805,-8.935 D4.2@82.125,-9.255 82.525,-8.855 82.525,-8.647 82.642,-8.53 82.81,-8.53 85.857,-11.577 87.508,-11.577 87.625,-11.694 X1.15@87.625,-13.1 X1.2@90.125,-13.1 X1.2@90.2,-13.175
CAN_P: D4.1 U4.7 X1.1 X1.16 | length 13.5
  Top Layer w0.2: U4.7@79.875,-7.665 81.81,-7.665 D4.1@82.125,-7.35 82.525,-7.75 82.525,-7.958 82.642,-8.076 82.998,-8.076 86.045,-11.123 87.508,-11.123 87.625,-11.006 X1.16@87.625,-9.6 X1.1@90.1,-9.6
GND: BAT1.N C1.1 C2.1 C3.1 C4.1 C5.1 C6.1 C7.1 C8.1 C9.1 C10.1 C11.1 C13.1 C15.1 C16.1 C17.1 C18.1 C19.1 C20.1 C21.1 C22.1 C23.1 C24.1 C25.1 C26.1 C27.1 C33.2 C34.1 C35.1 C36.1 C37.1 C38.2 D2.2 D3.3 D4.3 D6.2 D7.2 D8.2 D11.1 PMCU1.1 R1.2 R8.2 R11.2 R13.2 R16.1 R18.1 R19.1 R27.1 R65.2 R67.1 RLINK1.1 U1.8 U1.20 U1.23 U1.35 U1.47 U2.5 U3.4 U4.2 U5.15 U6.2 U7.1 U8.12 U8.18 U8.31 U8.47 U8.63 U9.1 U9.2 U9.3 U9.4 U9.7 U10.2 U11.2 U12.2 U13.2 U14.2 U15.2 U16.3 U17.3 U18.3 U19.3 U20.3 U21.2 U22.2 U23.2 U24.2 U25.2 U26.2 U27.4 X1.8 X1.9 X2.A1B12 X2.B1A12 X2.S1 X2.S2 X2.S3 X2.S4 X3.24 | length 150.2
  Top Layer w0.2: v1(63.775,-45.65) R1.2@63.775,-44.85 ; v1(65.3,-45.675) C2.1@65.3,-44.825
  Top Layer w0.254: U1.8@57.1,-37.325 v1(58.575,-37.325) ; RLINK1.1@58.27,-28.375 58.252,-28.393 58.265,-28.405 58.265,-30.065 58.825,-30.625 R11.2@58.825,-30.775 58.873,-30.823 58.873,-32.548 U1.47@58.875,-32.55 ; v1(61.875,-41.925) U1.20@61.875,-40.6 ; v1(63.125,-41.925) 63.125,-41.804 63.373,-41.556 63.373,-40.602 U1.23@63.375,-40.6 ; U1.35@65.15,-34.325 66.327,-34.325 66.504,-34.502 v1(66.625,-34.502) ; v1(77.8,-25.2) 77.802,-25.202 79.822,-25.202 U2.5@79.825,-25.205 ; C10.1@80.5,-38.75 80.55,-38.8 v1(80.55,-39.725) ; v1(80.7,-30.925) U5.15@80.7,-29.458 ; v1(83.5,-40.025) C11.1@83.5,-38.75
  Top Layer w0.3: R65.2@37.775,-43.775 37.8,-43.8 v1(40.325,-43.8) ; U8.12@42.8,-22.65 v1(43.95,-22.65) ; U8.18@45.3,-26.65 45.3,-25.766 45.563,-25.503 v1(45.563,-25.406) ; v1(45.3,-16.375) 45.3,-15.6 U8.63@45.3,-15.15 ; R27.1@49.142,-10.625 49.25,-10.517 v1(49.25,-9.525) ; v1(49.225,-49.675) R67.1@49.225,-48.7 ; U27.4@51.7,-50.445 52.419,-50.445 52.823,-50.04 52.823,-49.827 v1(52.9,-49.75) 52.823,-49.673 52.823,-49.248 C35.1@52.275,-48.7 ; U8.31@51.8,-26.65 51.8,-28.125 v1(51.825,-28.15) ; C27.1@52.3,-30.725 51.973,-31.052 51.85,-31.175 v1(51.85,-32.275) 53.05,-32.275 R8.2@53.1,-32.325 53.25,-32.475 53.25,-33 53.375,-33.125 C6.1@53.375,-33.875 ; v1(53.025,-17.5) 53.133,-17.5 53.283,-17.65 U8.47@54.3,-17.65 ; v1(54.975,-30.775) C1.1@55.95,-30.775 ; U10.2@55.598,-8.364 U10.2@55.598,-8.364 55.599,-7.401 v1(55.6,-7.4) ; v1(69.1,-49.275) R16.1@69.925,-49.275 ; C3.1@69.1,-33.825 69.337,-33.588 69.612,-33.588 v1(70.15,-33.05) ; U7.1@74.075,-42.68 75.07,-42.68 v1(75.757,-41.993) ; v1(74.325,-33.625) D2.2@74.325,-32.475 ; R13.2@83.625,-20.958 83.625,-21.4 v1(84.375,-22.15) ; v1(84.4,-7.3) 84.405,-7.305 84.405,-8.297 D4.3@84.411,-8.303
  Top Layer w0.4: v1(17.15,-52.45) 17.15,-53.222 U22.2@17.188,-53.26 ; U23.2@17.188,-48.752 17.77,-48.752 17.9,-48.882 v1(17.9,-49.8) ; U24.2@17.188,-43.875 U24.2@17.188,-44.184 17.188,-44.613 v1(17.2,-44.625) ; U25.2@17.188,-39.513 U25.2@17.188,-39.658 17.188,-40.25 v1(17.2,-40.262) ; U21.2@17.188,-35.15 17.188,-35.888 v1(17.2,-35.9) ; v1(28.525,-50.35) U17.3@30.1,-50.35 ; v1(28.65,-55.062) 28.662,-55.05 U16.3@29.4,-55.05 ; U12.2@29.075,-22.512 30.188,-22.512 v1(30.2,-22.5) ; U13.2@29.075,-16.875 30.188,-16.875 v1(30.2,-16.863) ; U14.2@29.075,-11.237 30.188,-11.237 v1(30.2,-11.225) ; U15.2@29.075,-5.6 30.188,-5.6 v1(30.2,-5.588) ; U11.2@29.2,-28.15 30.15,-27.2 v1(30.15,-27.175) ; U18.3@30.1,-45.52 30.1,-46.258 v1(30.112,-46.27) ; U19.3@30.1,-40.65 30.1,-41.388 v1(30.112,-41.4) ; U20.3@30.1,-35.85 30.1,-36.588 v1(30.112,-36.6) ; C17.1@33.425,-22.675 v1(33.425,-21.425) C19.1@33.425,-20.175 ; C18.1@34.275,-18.05 v1(34.275,-16.75) C20.1@34.275,-15.5 ; U9.4@37.19,-30.225 37.247,-30.168 37.247,-28.678 37.575,-28.35 v1@38.652,-28.35 ; v1(37.225,-4.925) 37.225,-7.65 BAT1.N@37.275,-7.7 ; U9.3@38.46,-30.225 38.46,-28.542 v1@38.652,-28.35 ; v1(38.665,-28.337) 38.722,-28.28 38.722,-27.678 C23.1@39.375,-27.025 C26.1@40.925,-27.025 C26.1@40.938,-27.013 ; U9.7@39.73,-35.125 U9.2@39.73,-30.225 v1@39.73,-28.351 ; v1(39.875,-14.225) 39.887,-14.213 41.237,-14.213 C21.1@41.25,-14.2 ; U9.1@41,-30.225 41.025,-30.2 41.025,-28.75 40.625,-28.35 39.729,-28.35 v1@38.652,-28.35 ; C22.1@44.597,-10.978 44.775,-10.8 v1@44.775,-9.65 ; v1(44.85,-30.75) C24.1@45.8,-30.75 ; v1(50.875,-39.875) 50.888,-39.862 51.862,-39.862 C5.1@51.875,-39.85 ; v1(51.85,-32.275) v1@51.862,-32.287 ; v1(53.025,-13.875) 53.106,-13.875 53.187,-13.956 C25.1@54.13,-13.956 ; v1(59.194,-45.75) 59.197,-45.747 59.197,-44.853 C4.1@59.2,-44.85 ; v1@64.6,-55.1 65.55,-56.05 C34.1@65.55,-56.1 ; v1@66.7,-53.9 67.65,-54.85 U26.2@68.899,-54.85 ; C37.1@74.1,-54.6 74.15,-54.65 C37.1@74.15,-54.7 C36.1@74.15,-56.1 74.35,-55.9 74.769,-55.9 75.269,-55.4 v1(75.35,-55.4) ; U3.4@74.975,-17.555 75.875,-17.555 77.475,-15.955 77.475,-13.5 78,-12.975 78,-12.225 C7.1@78.2,-12.025 78.213,-12.038 79.137,-12.038 v1(79.15,-12.05) ; U4.2@74.975,-7.665 75.029,-7.611 76.364,-7.611 76.7,-7.275 C8.1@76.7,-4.75 v1(75.55,-4.75) ; v1(75.6,-19.625) C13.1@76.65,-19.625 ; C9.1@78.2,-31.85 79.85,-31.85 v1@80.725,-30.975 ; U6.2@83.535,-48.775 83.63,-48.68 84.189,-48.68 84.669,-48.2 v1(84.75,-48.2) ; v1(84.375,-22.15) 84.393,-22.168 84.393,-23.287 D3.3@84.411,-23.305 ; R18.1@85.95,-52.625 85.963,-52.637 87.063,-52.637 v1(87.075,-52.65) ; R19.1@85.95,-45.125 85.963,-45.113 87.013,-45.113 v1(87.025,-45.1) ; X2.A1B12@88.355,-52.025 88.78,-52.025 88.88,-52.125 88.88,-52.955 X2.S1@89.05,-53.125 ; X2.B1A12@88.55,-45.45 88.855,-45.45 88.88,-45.425 88.88,-44.755 89.18,-44.455 X2.S2@89.27,-44.455
  Top Layer w0.5: D8.2@43.05,-37.975 D6.2@45.825,-37.975 D7.2@48.25,-37.975 ; v1(47.33,-39.105) 47.33,-39.051 47.925,-38.456 47.925,-38.3 D7.2@48.25,-37.975 ; D7.2@48.9,-37.975 D7.2@48.575,-37.975 D7.2@48.25,-37.975 ; C16.1@83.35,-42.95 C15.1@83.35,-41.425 83.35,-40.229 83.5,-40.079 v1(83.5,-40.025)
  Top Layer w0.7: v1(64.55,-55) D11.1@64.55,-54.05 ; C38.2@41.95,-43.5 42.6,-44.15 43.25,-43.5 v1(43.25,-42.35) v1(41.95,-42.35) C38.2@41.95,-43.5 ; v1(46.85,-45.225) 48,-45.225 48.65,-44.575 48,-43.925 v1(46.85,-43.925) v1(46.85,-45.225)
  other v1: 1.4,-58.55 4.368,-58.55 7.335,-58.55 10.303,-58.55 13.271,-58.55 16.239,-58.55 19.206,-58.55 22.174,-58.55 25.142,-58.55 28.11,-58.55 31.077,-58.55 34.045,-58.55 37.013,-58.55 39.981,-58.55 42.948,-58.55 45.916,-58.55 48.884,-58.55 51.852,-58.55 54.819,-58.55 57.787,-58.55 60.755,-58.55 63.723,-58.55 66.69,-58.55 69.658,-58.55 72.626,-58.55 75.594,-58.55 78.561,-58.55 81.529,-58.55 84.497,-58.55 87.464,-58.55 90.432,-58.55 93.4,-58.55 66.65,-53.9 39.743,-28.338 44.775,-9.55 1.4,-1.45 4.368,-1.45 7.335,-1.45 10.303,-1.45 13.271,-1.45 16.239,-1.45 19.206,-1.45 22.174,-1.45 25.142,-1.45 28.11,-1.45 31.077,-1.45 34.045,-1.45 37.013,-1.45 39.981,-1.45 42.948,-1.45 45.916,-1.45 48.884,-1.45 51.852,-1.45 54.819,-1.45 57.787,-1.45 60.755,-1.45 63.723,-1.45 66.69,-1.45 69.658,-1.45 72.626,-1.45 75.594,-1.45 78.561,-1.45 81.529,-1.45 84.497,-1.45 87.464,-1.45 90.432,-1.45 93.4,-1.45
HUB3.3: C15.2 C16.2 R17.2 U7.21 U7.26 | length 9.2
  Top Layer w0.3: U7.21@79.775,-47.125 80.65,-47.125 81.875,-45.9 R17.2@81.875,-44.5 ; U7.26@79.775,-43.95 81.775,-43.95 81.875,-44.05
  Top Layer w0.5: C16.2@81.85,-42.95 C16.2@81.862,-42.95 ; C15.2@81.85,-41.425 81.862,-41.437 C16.2@81.862,-42.95 ; R17.2@81.875,-44.5 81.862,-44.488 81.862,-44.337 81.862,-44.05 C16.2@81.862,-42.95
IN0: R30.1 X3.2 | length 19.6
  Top Layer w0.254: R30.1@21.35,-52.3 v1(21.35,-51.3)
  Bottom Layer w0.254: X3.2@5,-45.75 6.7,-47.45 13.85,-47.45 17.7,-51.3 v1(21.35,-51.3)
IN1: R31.1 X3.3 | length 19.2
  Top Layer w0.254: R31.1@21.35,-47.6 v1(21.35,-46.6)
  Bottom Layer w0.254: X3.3@5,-42.25 6.75,-44 14.7,-44 16.65,-45.95 20.7,-45.95 v1(21.35,-46.6)
IN2: R32.1 X3.4 | length 18.6
  Top Layer w0.254: R32.1@21.35,-42.85 v1(21.35,-41.85)
  Bottom Layer w0.3: X3.4@5,-38.75 6.6,-40.35 14.6,-40.35 16.1,-41.85 v1(21.35,-41.85)
IN3: R33.1 X3.5 | length 18.3
  Top Layer w0.254: R33.1@21.45,-38.4 v1(21.45,-37.4)
  Bottom Layer w0.3: X3.5@5,-35.25 6.65,-36.9 20.95,-36.9 v1(21.45,-37.4)
IN4: R34.1 X3.6 | length 21
  Top Layer w0.254: R34.1@21.45,-36.2 21.65,-36.2 v1(22.45,-37)
  Bottom Layer w0.3: X3.6@5,-31.75 6.6,-33.35 16.4,-33.35 18.95,-35.9 21.35,-35.9 v1(22.45,-37)
IN_COM: C28.1 C29.1 C30.1 C31.1 C32.1 R40.1 R41.1 R42.1 R43.1 R44.1 U16.2 U17.2 U18.2 U19.2 U20.2 X3.7 | length 31.4
  Top Layer w0.3: U16.2@23.75,-55.02 24.98,-55.02 25.6,-54.4 v1(25.6,-53.7) ; U17.2@23.75,-50.35 v1(25.3,-50.35) ; U18.2@23.75,-45.52 25.23,-45.52 v1(25.25,-45.5) ; U19.2@23.75,-40.65 v1(25.25,-40.65) ; U20.2@23.75,-35.85 v1(25.25,-35.85) ; C29.1@26,-47.3 v1(26,-46.35) 28.1,-46.35 R41.1@29.05,-47.3 ; C28.1@26.1,-52.05 26.05,-52 v1(26.05,-51.1) 28.2,-51.1 R40.1@29.15,-52.05 ; C30.1@26.1,-42.5 v1(26.1,-41.65) 28.25,-41.65 R42.1@29.15,-42.55 ; C31.1@26.1,-37.65 v1(26.1,-36.6) 28.15,-36.6 R43.1@29.15,-37.6 ; C32.1@26.1,-32.8 v1(26.1,-31.8) 28.85,-31.8 29.15,-32.1 R44.1@29.15,-32.8
KEY0_0: Q1.3 X3.17 | length 37.3
  Top Layer w1: 10.3,-30.25 v2(11.1,-30.25) 11.8,-30.95 v2(11.9,-30.95) 11.9,-31.85 12.15,-32.1
  Top Layer w1.2: X3.17@7.5,-24.75 7.5,-25.35 10.3,-28.15 10.3,-30.25 11.9,-31.85 ; 12.15,-32.1 13.258,-32.1
  Top Layer w1.5: 13.258,-32.1 13.3,-32.1
  BotInt Layer w1.2: X3.17@7.5,-24.75 7.5,-25.35 10.3,-28.15 10.3,-29.35 v2(11.9,-30.95)
  TopInt Layer w1.2: X3.17@7.5,-24.75 7.5,-25.35 10.3,-28.15 10.3,-29.35 v2(11.9,-30.95)
  Bottom Layer w1.2: X3.17@7.5,-24.75 7.5,-25.35 10.09,-27.94 10.09,-29.204 11.836,-30.95 v2(11.9,-30.95)
KEY0_1: Q1.6 X3.8 | length 54
  Top Layer w0.9: X3.8@5,-24.75 5,-24.35 6.35,-23 8.35,-23 9.65,-24.3 9.65,-25.25
  Top Layer w1: v2@11.9,-28.8 13.1,-28.8 13.1,-29.562 13.438,-29.9
  Top Layer w1.2: 9.65,-25.25 11.9,-27.5 v2@11.9,-28.8 ; v2@11.9,-28.362 13.1,-29.562 ; 13.438,-29.9 14.25,-29.9
  BotInt Layer w0.9: X3.8@5,-24.75 5,-24.35 6.35,-23 8.35,-23 9.65,-24.3 9.65,-25.25
  BotInt Layer w1.2: 9.65,-25.25 11.9,-27.5 11.8,-27.85 11.9,-28.362 11.887,-28.35 11.811,-28.385 12.05,-28.921 v2@12.175,-28.882
  TopInt Layer w0.9: X3.8@5,-24.75 5,-24.35 6.35,-23 8.35,-23 9.65,-24.3 9.65,-25.25
  TopInt Layer w1.2: 9.65,-25.25 11.9,-27.5 v2@11.8,-27.85 ; v2@11.8,-27.85 12.005,-27.988 12.121,-28.584 11.887,-28.35 v2@11.8,-27.85
  Bottom Layer w0.9: X3.8@5,-24.75 5,-24.35 6.35,-23 8.35,-23 9.65,-24.3 9.65,-25.25
  Bottom Layer w1.2: 9.65,-25.25 11.9,-27.5 v2@11.8,-27.85 ; v2@12.342,-28.956 11.872,-28.708 11.7,-28.156 11.7,-28.04 v2@11.8,-27.85 ; v2@11.8,-27.85 11.9,-28.362 11.887,-28.35 v2@11.8,-27.85
  other v2: 12.1,-28.8 11.8,-27.9
KEY1_0: Q2.3 X3.16 | length 34.5
  Top Layer w0.9: X3.16@7.5,-21.25 8.4,-21.25 11.2,-24.05 v2@11.2,-24.5
  Top Layer w1.1: v2@11.175,-24.5 12.625,-25.95
  Top Layer w1.2: 12.65,-25.95 14.35,-25.95
  BotInt Layer w0.9: X3.16@7.5,-21.25 8.4,-21.25 11.1,-23.95 v2@11.1,-24.05 ; v2@11.1,-24.05 11.6,-24.55 ; v2@11.1,-24.05 v2(11.1,-24.45) v2@11.45,-24.8 ; v2@11.45,-24.8 v2@11.6,-24.8 ; v2@11.45,-24.8 11.775,-25.125 v2(11.925,-25.125) v2@11.6,-24.8 ; v2@11.6,-24.8 11.6,-24.55 ; v2@11.6,-24.8 11.85,-24.8 11.6,-24.55
  TopInt Layer w0.9: X3.16@7.5,-21.25 8.4,-21.25 11.1,-23.95 v2@11.1,-24.05 ; v2@11.1,-24.05 11.85,-24.8 11.6,-24.8 11.45,-24.8 v2(11.1,-24.45) v2@11.1,-24.05
  TopInt Layer w1: v2@11.6,-24.8 v2(11.925,-25.125)
  Bottom Layer w0.9: X3.16@7.5,-21.25 8.4,-21.25 v2@11.1,-23.95 ; v2@11.1,-24.05 11.85,-24.8 v2@11.45,-24.8 ; v2@11.1,-24.05 v2(11.1,-24.45) v2@11.45,-24.8 ; v2@11.1,-24.05 v2@11.1,-23.95 ; v2@11.1,-23.95 11.925,-24.775 v2(11.925,-25.125) 11.775,-25.125 v2@11.45,-24.8
KEY1_1: Q2.6 X3.9 | length 43.9
  Top Layer w0.9: X3.9@5,-21.25 5,-20.7 6.2,-19.5 8.55,-19.5 12.35,-23.3 Q2.6@13.075,-23.3 ; v2@12.05,-22.3 13.05,-22.3 13.05,-23.275 Q2.6@13.075,-23.3 ; Q2.6@13.3,-23.15 Q2.6@13.15,-23.3 ; 15.1,-23.3 Q2.6@13.15,-23.3 ; Q2.6@13.075,-23.3 Q2.6@13.15,-23.3
  BotInt Layer w0.9: X3.9@5,-21.25 5,-20.7 6.2,-19.5 8.55,-19.5 11.35,-22.3 v2@12.45,-22.3
  TopInt Layer w0.9: X3.9@5,-21.25 5,-20.7 6.2,-19.5 8.55,-19.5 11.35,-22.3 v2@12.4,-22.3
  Bottom Layer w0.9: X3.9@5,-21.25 5,-20.7 6.2,-19.5 8.55,-19.5 11.35,-22.3 v2@12.45,-22.3
  other v2: 11.4,-22.175 12.4,-22.175
KEY2_0: Q3.3 X3.15 | length 24.7
  Top Layer w1.2: X3.15@7.45,-18.1 9.8,-18.1 10.1,-18.4 ; X3.15@7.5,-17.75 X3.15@7.8,-18.05
  Top Layer w1.5: 10.1,-18.4 11.95,-20.25 Q3.3@15.4,-20.25
  BotInt Layer w1.2: X3.15@7.45,-18.1 9.8,-18.1 10.1,-18.4 ; X3.15@7.5,-17.75 X3.15@7.8,-18.05
  BotInt Layer w1.5: 10.1,-18.4 v2@11.475,-19.775
  TopInt Layer w1.2: X3.15@7.45,-18.1 9.8,-18.1 10.1,-18.4 ; X3.15@7.5,-17.75 X3.15@7.8,-18.05
  TopInt Layer w1.5: 10.1,-18.4 v2@11.475,-19.775
  Bottom Layer w1.2: X3.15@7.45,-18.1 9.8,-18.1 10.1,-18.4 ; X3.15@7.5,-17.75 X3.15@7.8,-18.05
  Bottom Layer w1.5: 10.1,-18.4 v2@11.475,-19.775
  other v2: 11.5,-19.45 10.75,-18.75
KEY2_1: Q3.6 X3.10 | length 37.8
  Top Layer w0.8: X3.10@5,-17.75 6.7,-16.05 9.25,-16.05
  Top Layer w1: v2@11.4,-16.4 11.6,-16.2 v2(12.1,-16.2) 12.95,-16.2 12.95,-17.45 12.7,-17.7
  Top Layer w1.5: 9.4,-16.4 11.4,-16.4 12.7,-17.7 12.85,-17.85 Q3.6@15.4,-17.85
  BotInt Layer w0.8: X3.10@5,-17.75 6.7,-16.05 9.25,-16.05
  BotInt Layer w1.5: 9.4,-16.4 v2@12.05,-16.4
  TopInt Layer w0.8: X3.10@5,-17.75 6.7,-16.05 9.25,-16.05
  TopInt Layer w1.5: 9.4,-16.4 v2@12.1,-16.4
  Bottom Layer w0.8: X3.10@5,-17.75 6.7,-16.05 9.25,-16.05
  Bottom Layer w1.5: 9.4,-16.4 v2@12.15,-16.4
  other v2: 11.1,-16.2
KEY3_0: Q4.3 X3.14 | length 19.8
  Top Layer w2: X3.14@7.5,-14.25 13.8,-14.25 14,-14.45
  BotInt Layer w2: X3.14@7.5,-14.25 v2@11.9,-14.25
  TopInt Layer w2: X3.14@7.5,-14.25 v2@11.9,-14.25
  Bottom Layer w2: X3.14@7.5,-14.25 v2@11.9,-14.25
  other v2: 10.9,-13.75 11.9,-13.75
KEY3_1: Q4.6 X3.11 | length 35.4
  Top Layer w0.8: X3.11@5,-14.25 6.75,-12.5 9.6,-12.5 10.4,-11.7
  Top Layer w2: 10.4,-11.7 14.6,-11.7 ; 14.2,-11.75 14.55,-11.75 14.6,-11.7 ; 14.7,-11.6 14.6,-11.7 ; Q4.6@14.9,-11.7 14.6,-11.7
  BotInt Layer w0.8: X3.11@5,-14.25 6.75,-12.5 9.6,-12.5 10.4,-11.7
  BotInt Layer w2: 10.4,-11.7 11.9,-11.7
  TopInt Layer w0.8: X3.11@5,-14.25 6.75,-12.5 9.6,-12.5 10.4,-11.7
  TopInt Layer w2: 10.4,-11.7 11.9,-11.7
  Bottom Layer w0.8: X3.11@5,-14.25 6.75,-12.5 9.6,-12.5 10.4,-11.7
  Bottom Layer w2: 10.4,-11.7 11.9,-11.7
  other v2: 11.05,-11.2 12.05,-11.2
KEY4_0: Q5.3 X3.13 | length 27.8
  Top Layer w1.5: 14.197,-8.65 14.6,-8.65
  Top Layer w2: X3.13@7.5,-10.75 7.5,-10.25 9.505,-8.245 Q5.3@15.375,-8.245
  BotInt Layer w2: X3.13@7.5,-10.75 7.5,-10.25 9.505,-8.245 12.25,-8.245
  TopInt Layer w2: X3.13@7.5,-10.75 7.5,-10.25 9.505,-8.245 12.25,-8.245
  Bottom Layer w2: X3.13@7.5,-10.75 7.5,-10.25 9.505,-8.245 12.25,-8.245
  other v2: 11.15,-7.75 12.15,-7.75
KEY4_1: Q5.6 X3.12 | length 44.8
  Top Layer w2: X3.12@5,-10.75 5,-8.25 7.5,-5.75 14.175,-5.75
  BotInt Layer w2: X3.12@5,-10.75 5,-8.25 7.5,-5.75 12.15,-5.75
  TopInt Layer w2: X3.12@5,-10.75 5,-8.25 7.5,-5.75 12.15,-5.75
  Bottom Layer w2: X3.12@5,-10.75 5,-8.25 7.5,-5.75 12.15,-5.75
  other v2: 11.15,-5.25 12.15,-5.25
LED_STLINK: R5.2 R6.2 U1.30 | length 12.1
  Top Layer w0.2: U1.30@65.15,-36.825 66.279,-36.825 67.279,-37.825 v1(68.4,-37.825) ; v1(66.575,-33.025) 67.035,-32.565 67.4,-32.565 67.6,-32.365 R5.2@67.6,-30.775
  Bottom Layer w0.2: v1(66.575,-33.025) 68.4,-34.85 v1(68.4,-37.825)
MCU_USB_N: U7.8 U8.44 | length 45.6
  Top Layer w0.279: U8.44@54.3,-19.15 54.311,-19.161 55.014,-19.161 55.239,-19.386 55.239,-21.071 55.879,-21.71 57.91,-21.71 58.52,-22.32 58.52,-22.753 58.357,-22.916 58.03,-22.916 v1(57.65,-22.537) ; v1(72.7,-36.65) 72.7,-36.764 72.489,-36.975 72.489,-46.735 72.957,-47.203 73.24,-47.203 73.308,-47.136 74.064,-47.136 U7.8@74.075,-47.125
  Bottom Layer w0.279: v1(57.65,-22.537) 58.03,-22.916 63.916,-22.916 67.016,-22.916 72.489,-28.389 72.489,-36.325 72.7,-36.536 v1(72.7,-36.65)
MCU_USB_P: R20.1 U7.9 U8.45 | length 50.7
  Top Layer w0.279: U8.45@54.3,-18.65 54.311,-18.661 55.191,-18.661 ; R20.1@55.9,-15.45 55.9,-17.952 55.191,-18.661 ; v1(57.65,-23.775) 58.03,-23.395 58.555,-23.395 58.999,-22.951 58.999,-22.122 58.108,-21.232 56.078,-21.232 55.718,-20.872 55.718,-19.187 55.191,-18.661 ; v1(71.8,-36.65) 71.8,-36.764 72.011,-36.975 72.011,-46.933 72.759,-47.682 73.24,-47.682 73.308,-47.749 74.064,-47.749 U7.9@74.075,-47.76
  Bottom Layer w0.279: v1(57.65,-23.775) 58.03,-23.395 61.517,-23.395 64.114,-23.395 66.818,-23.395 72.011,-28.588 72.011,-36.325 71.8,-36.536 v1(71.8,-36.65)
MEM_SCL: R22.1 U8.58 U9.6 | length 38.7
  Top Layer w0.2: U9.6@38.46,-35.125 38.46,-37.783 38.575,-37.898 38.575,-37.9 38.775,-38.1 R22.1@39,-38.1 ; R22.1@38.925,-38.1 39.212,-38.1 39.85,-38.1 42.425,-40.675 v1(43.826,-40.675) ; U8.58@47.8,-15.15 47.8,-18.413 50.225,-20.838 v1(50.225,-23.6)
  Bottom Layer w0.2: v1(43.826,-40.675) 50.45,-34.051 50.45,-23.96 50.225,-23.735 v1(50.225,-23.6)
MEM_SDA: R21.1 U8.59 U9.5 | length 42.5
  Top Layer w0.2: U9.5@37.19,-35.125 37.19,-37.9 37.39,-38.1 R21.1@37.4,-38.1 37.55,-38.1 38.325,-38.875 39.65,-38.875 42.1,-41.325 v1(44.5,-41.325) ; U8.59@47.3,-15.15 47.3,-18.675 49.575,-20.95 v1(49.575,-22.75)
  Bottom Layer w0.2: v1(44.5,-41.325) 44.596,-41.229 44.596,-40.92 51.075,-34.441 51.075,-23.325 50.5,-22.75 v1(49.575,-22.75)
NetBUZ1_2: BUZ1.2 R29.1 U10.3 | length 6.8
  Top Layer w0.254: R29.1@54.125,-10.375 54.125,-10.45 54.325,-10.65 U10.3@56.55,-10.65 58.8,-10.65 59.475,-9.975 BUZ1.2@59.475,-8.925